# Altium PCB ETR_CELLMETER_SLAVE.PcbDoc (part 1 of 3)
Units mm, origin at the board's own origin, x right, y up, seen from the top; angles counter-clockwise.
Board outline 150 x 85 mm, 4 copper layers (Top Layer, GND, PWR, Bottom Layer), stack 1.306 mm thick; 204 components, 127 nets, 635 pads, 234 vias.
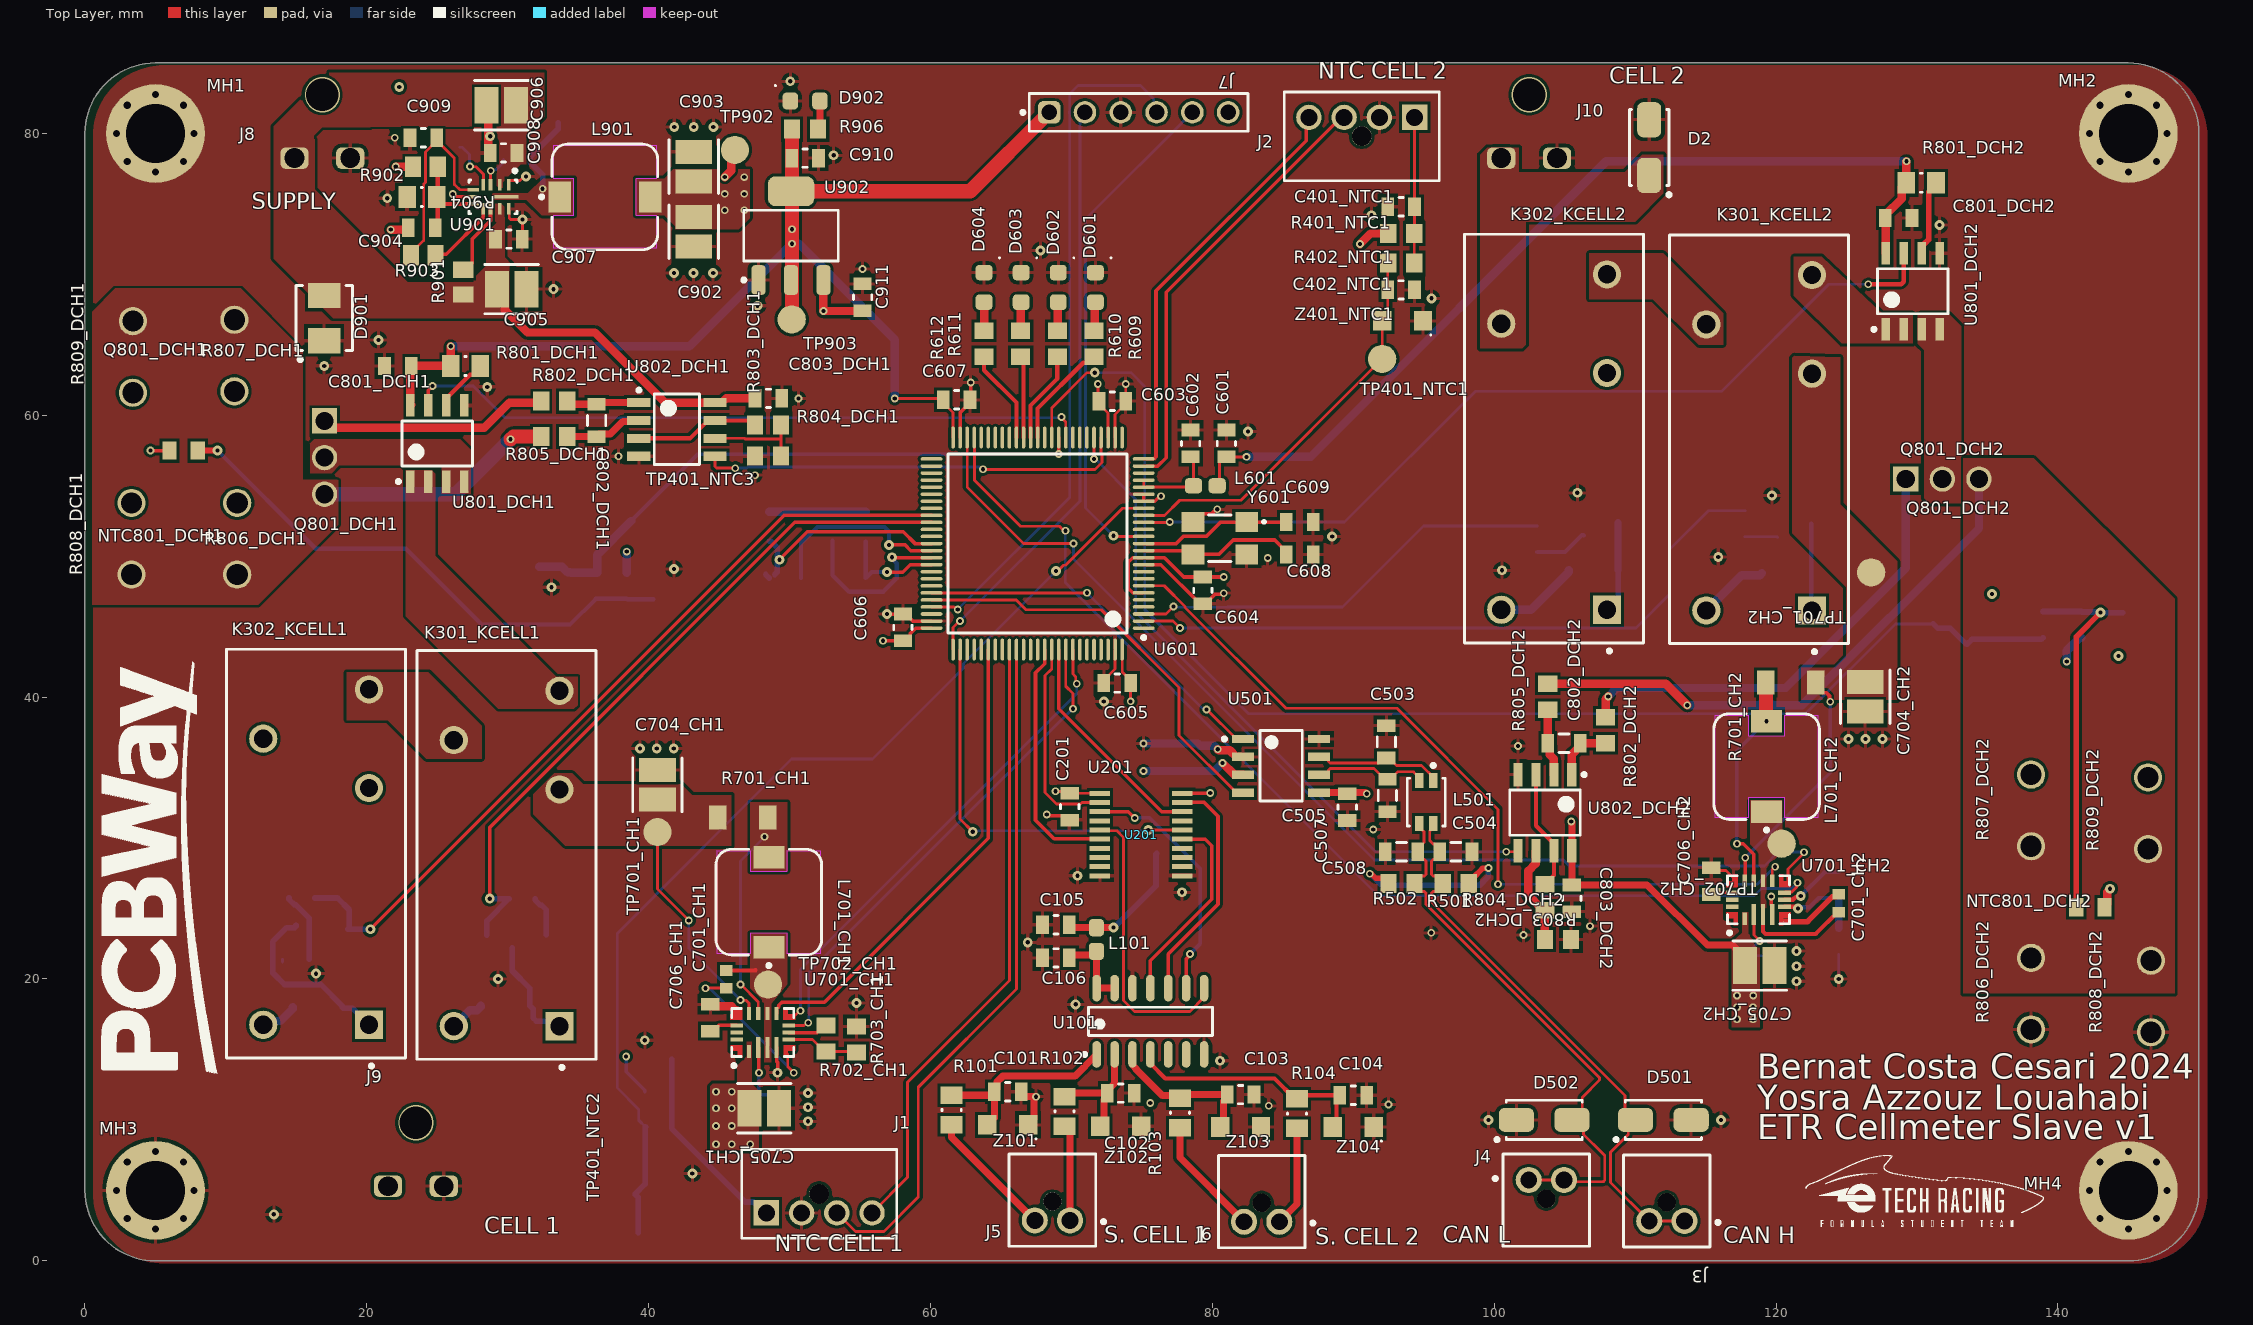
[diagram p0: Top Layer view]
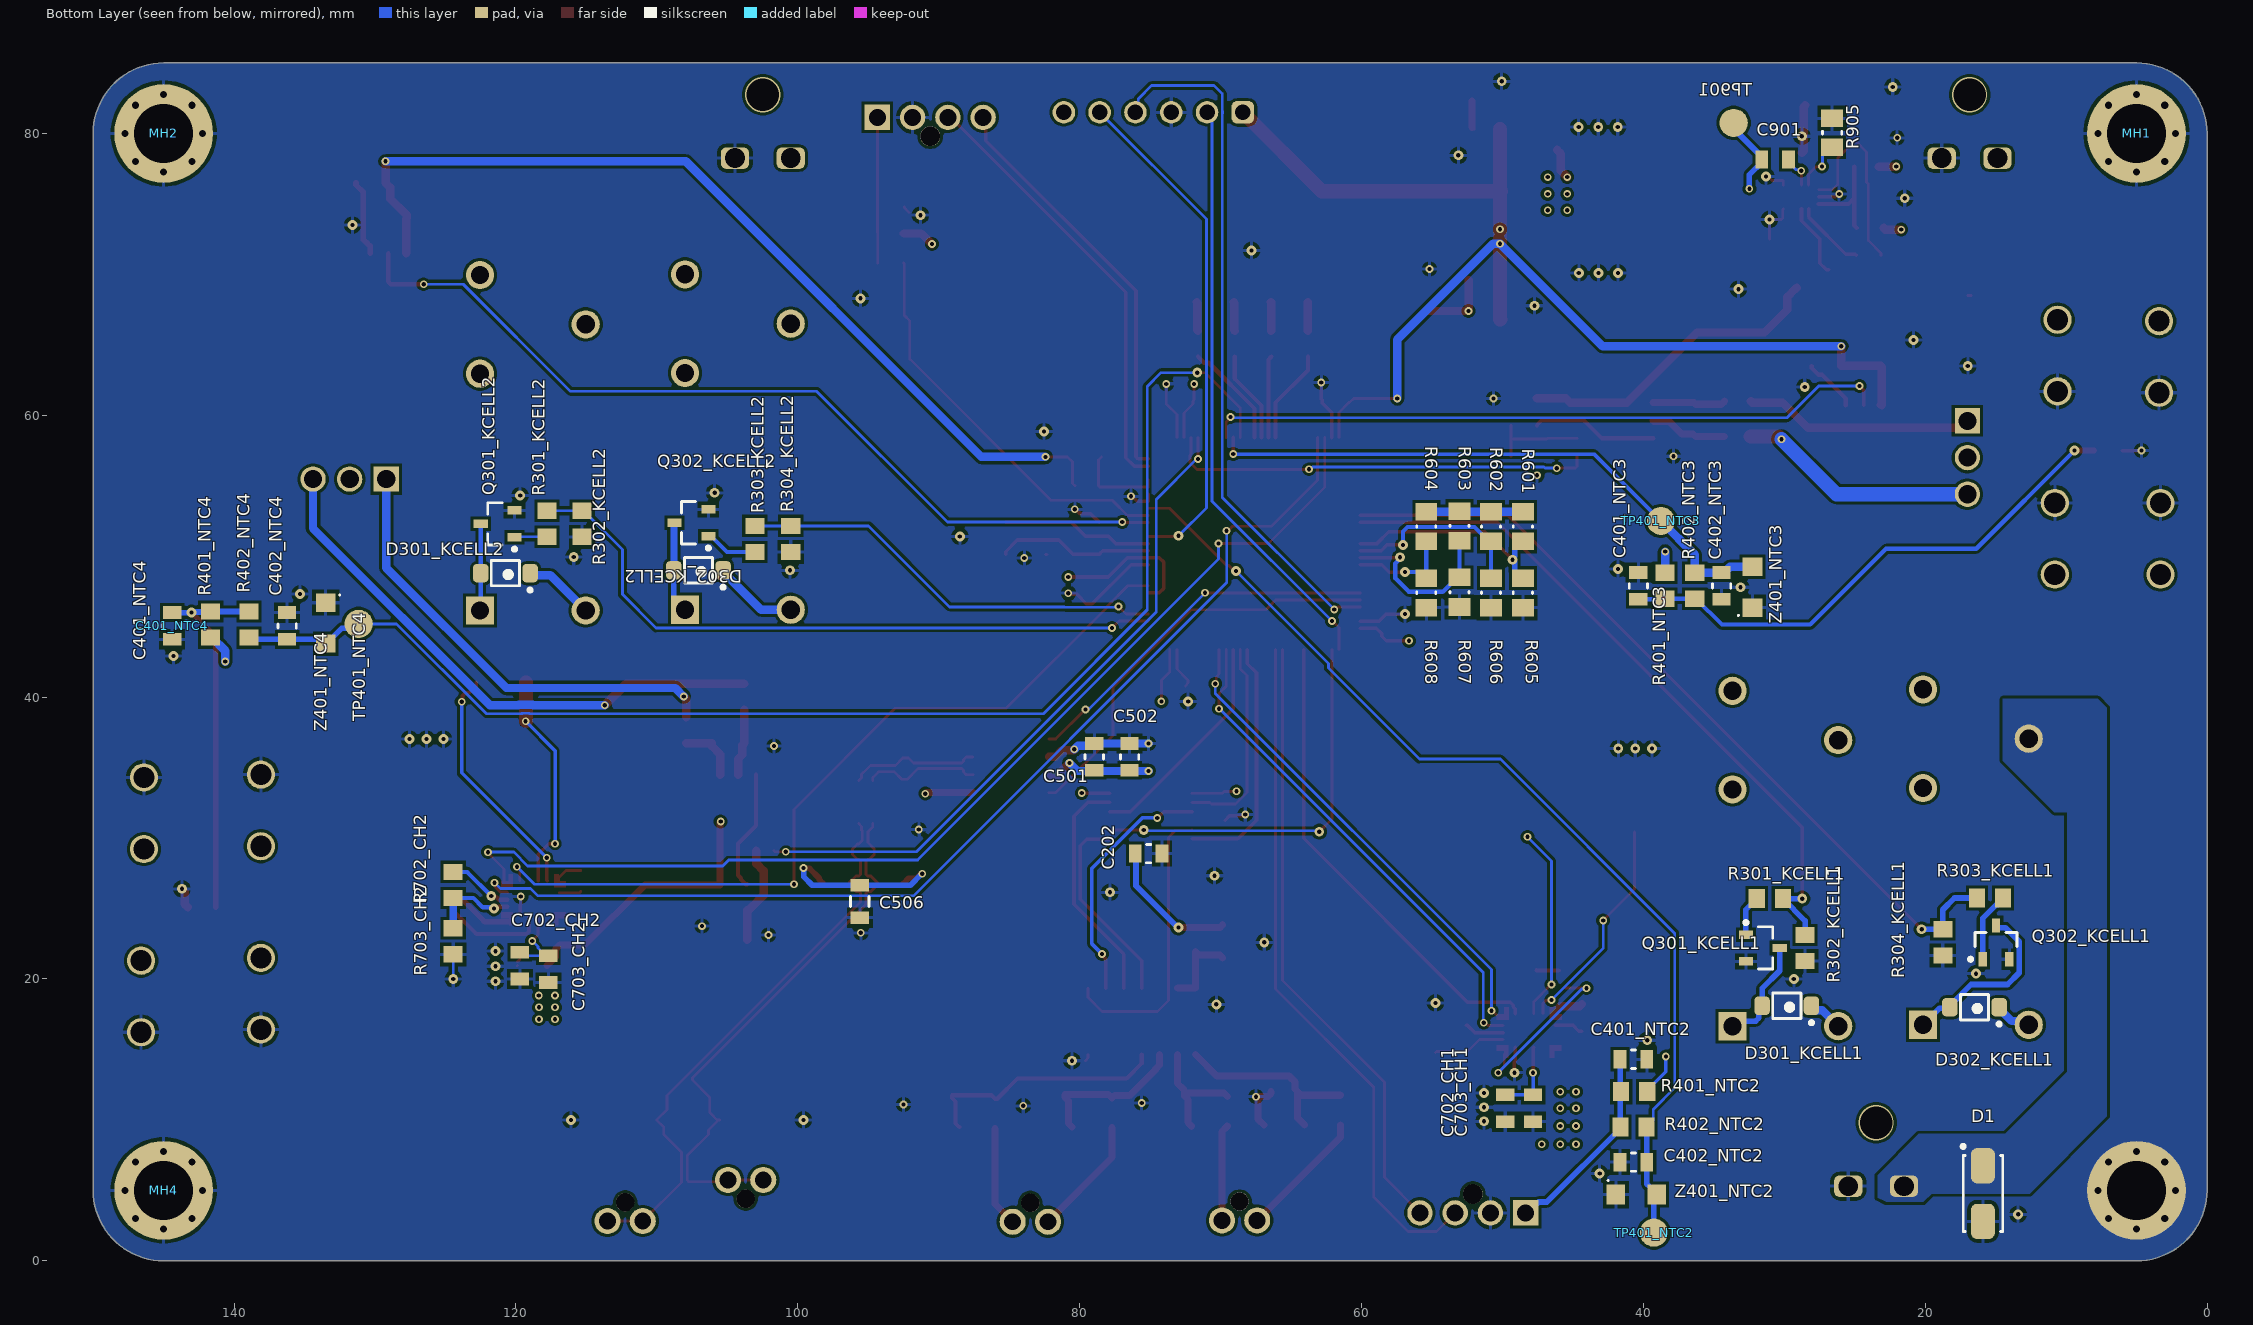
[diagram p1: Bottom Layer view, seen from below]
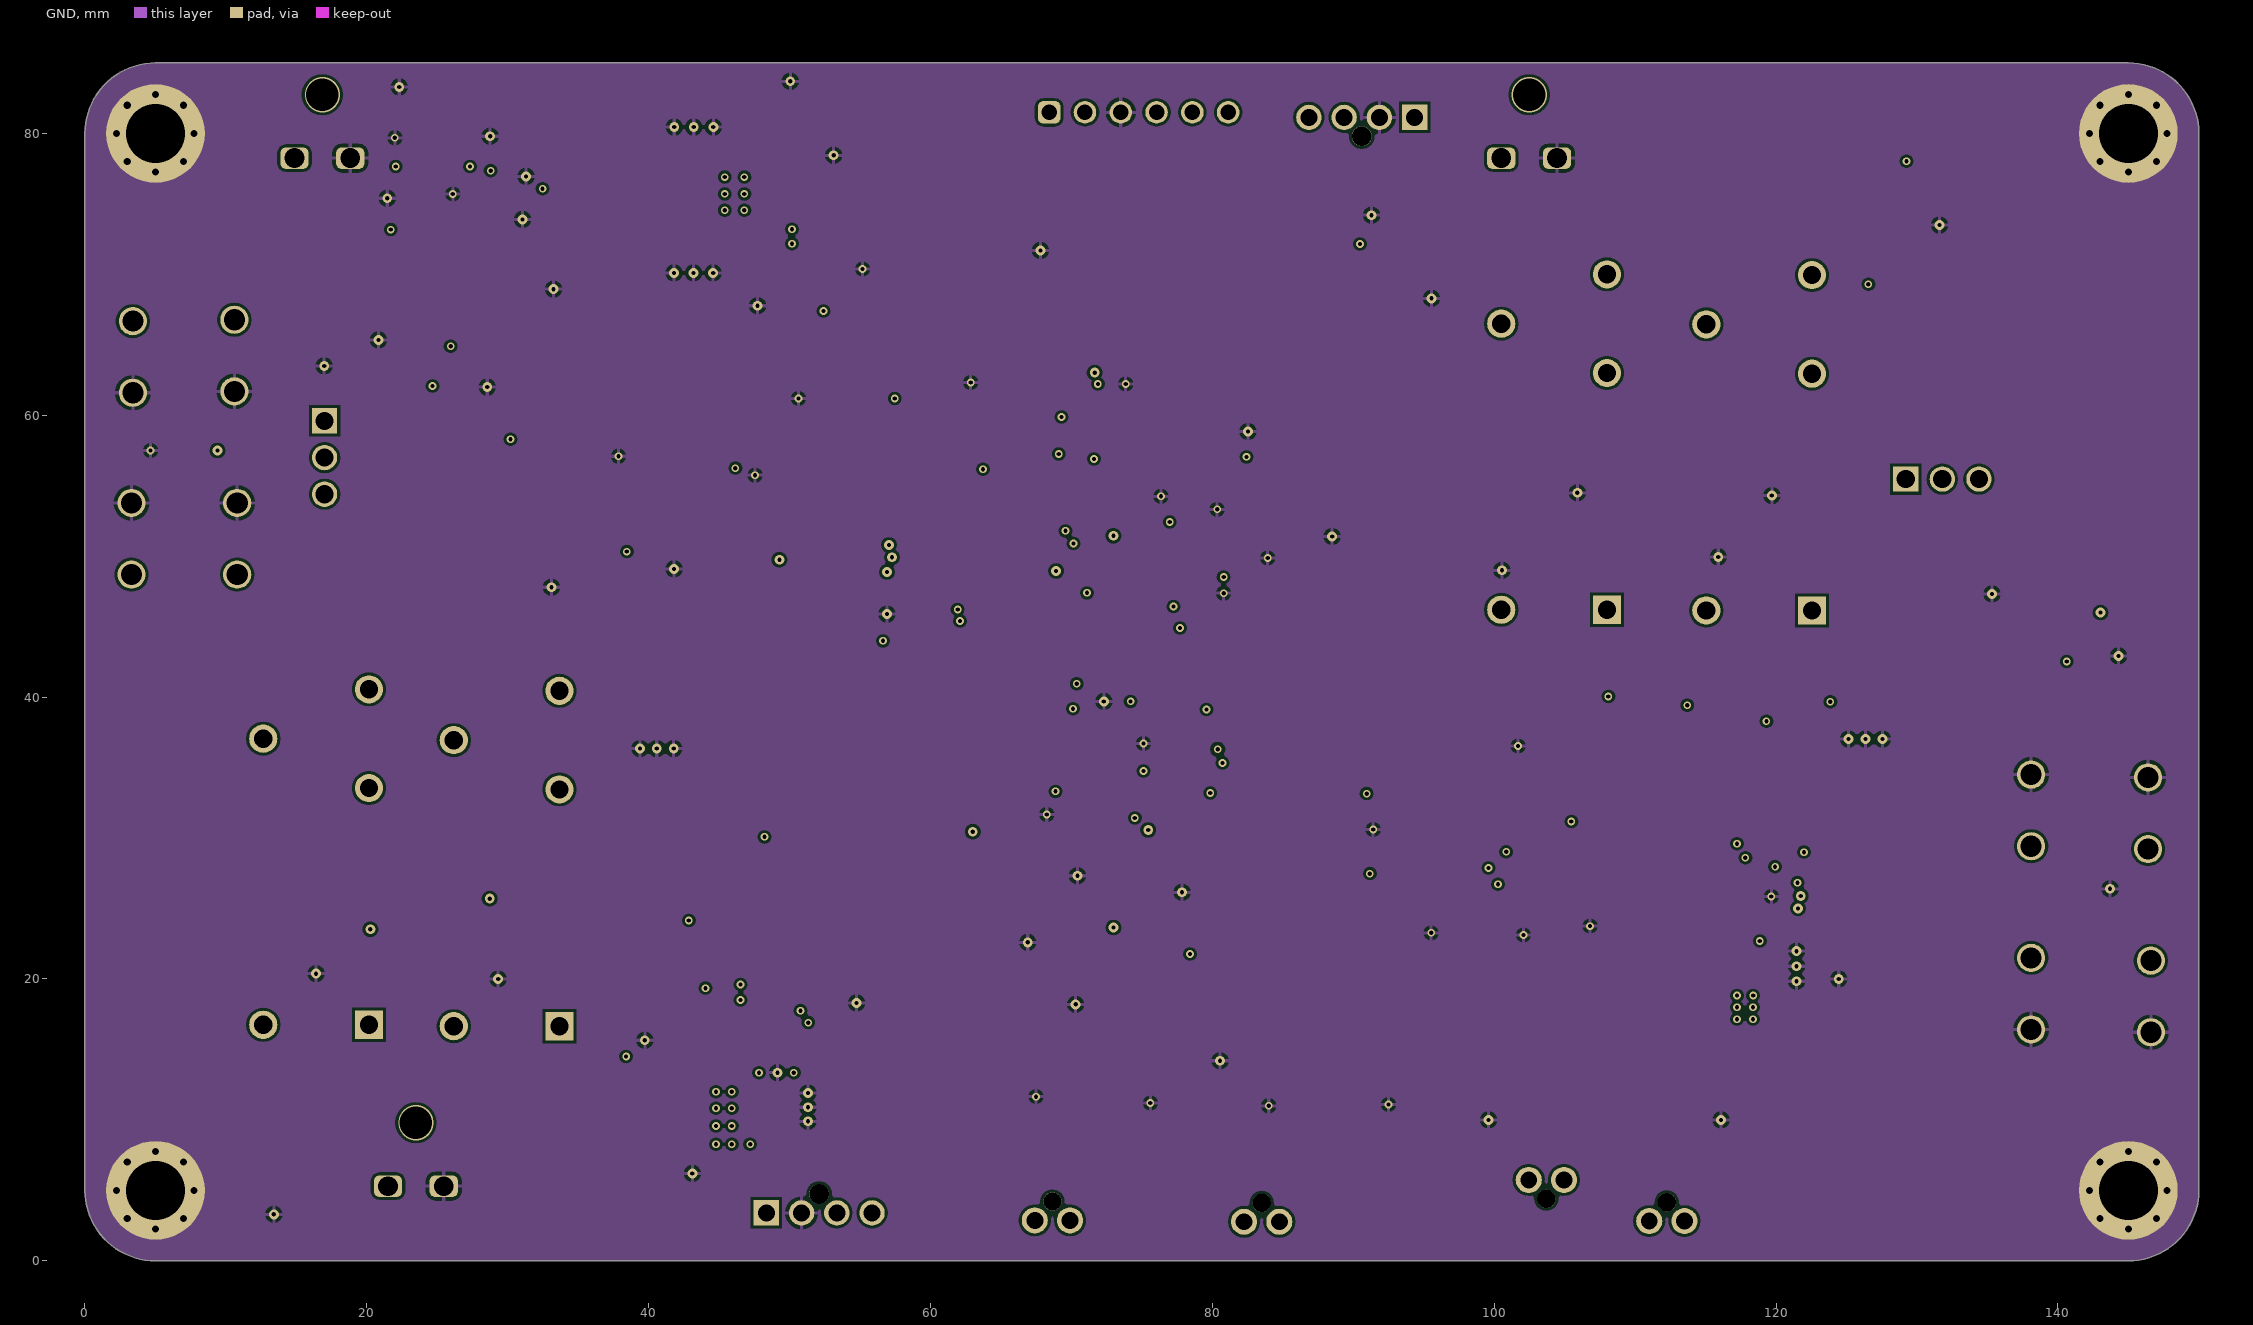
[diagram p2: GND]
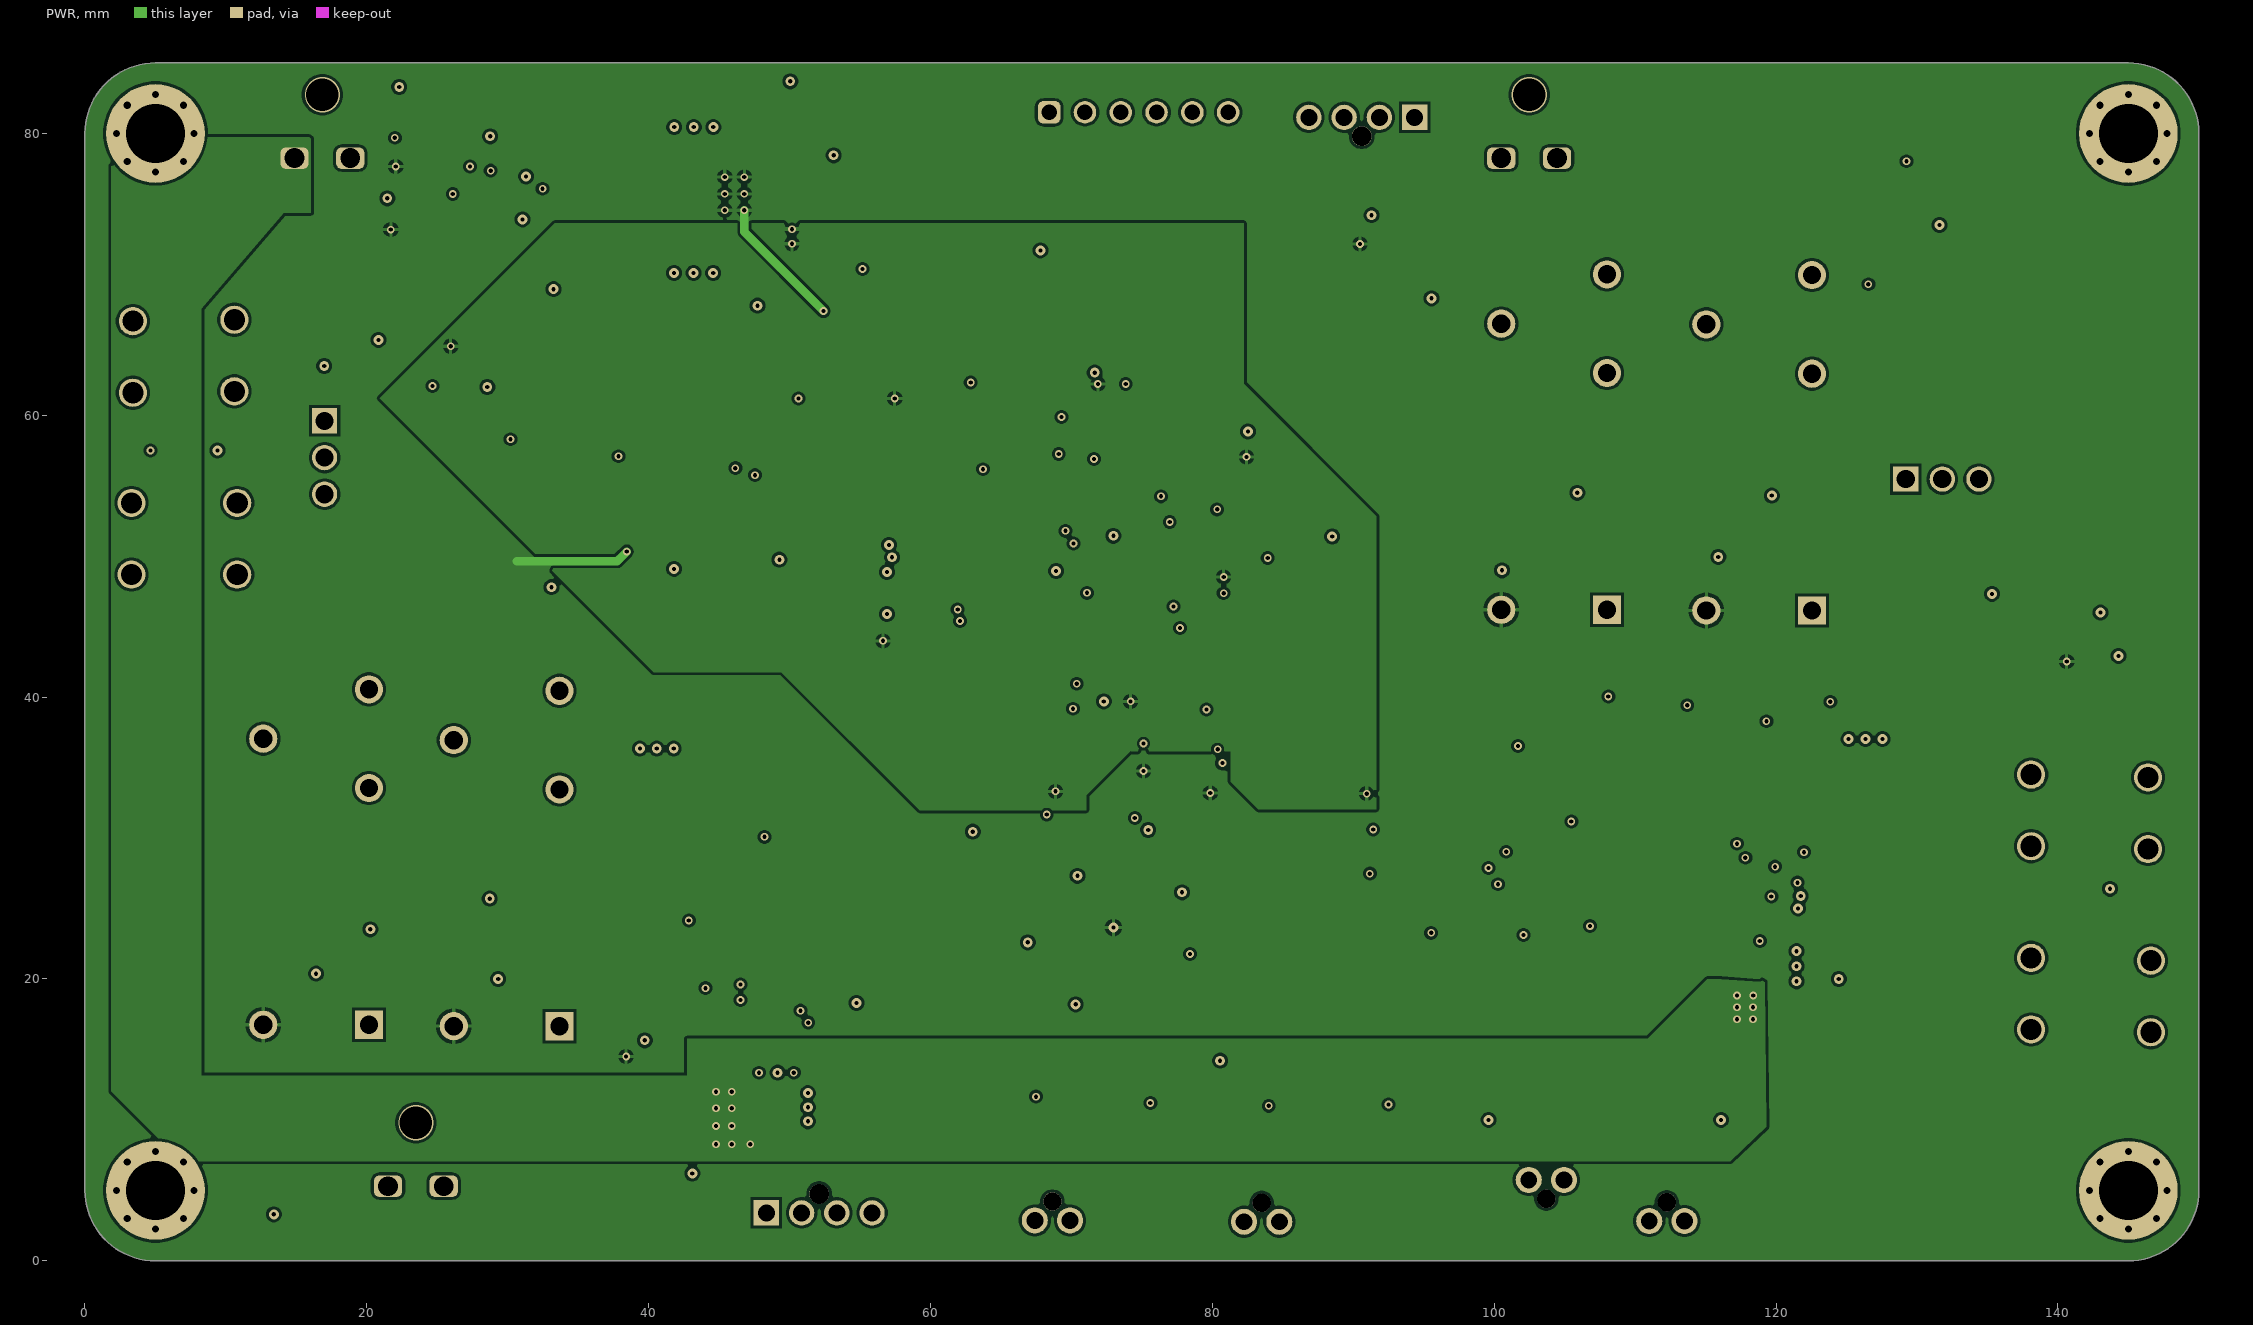
[diagram p3: PWR]
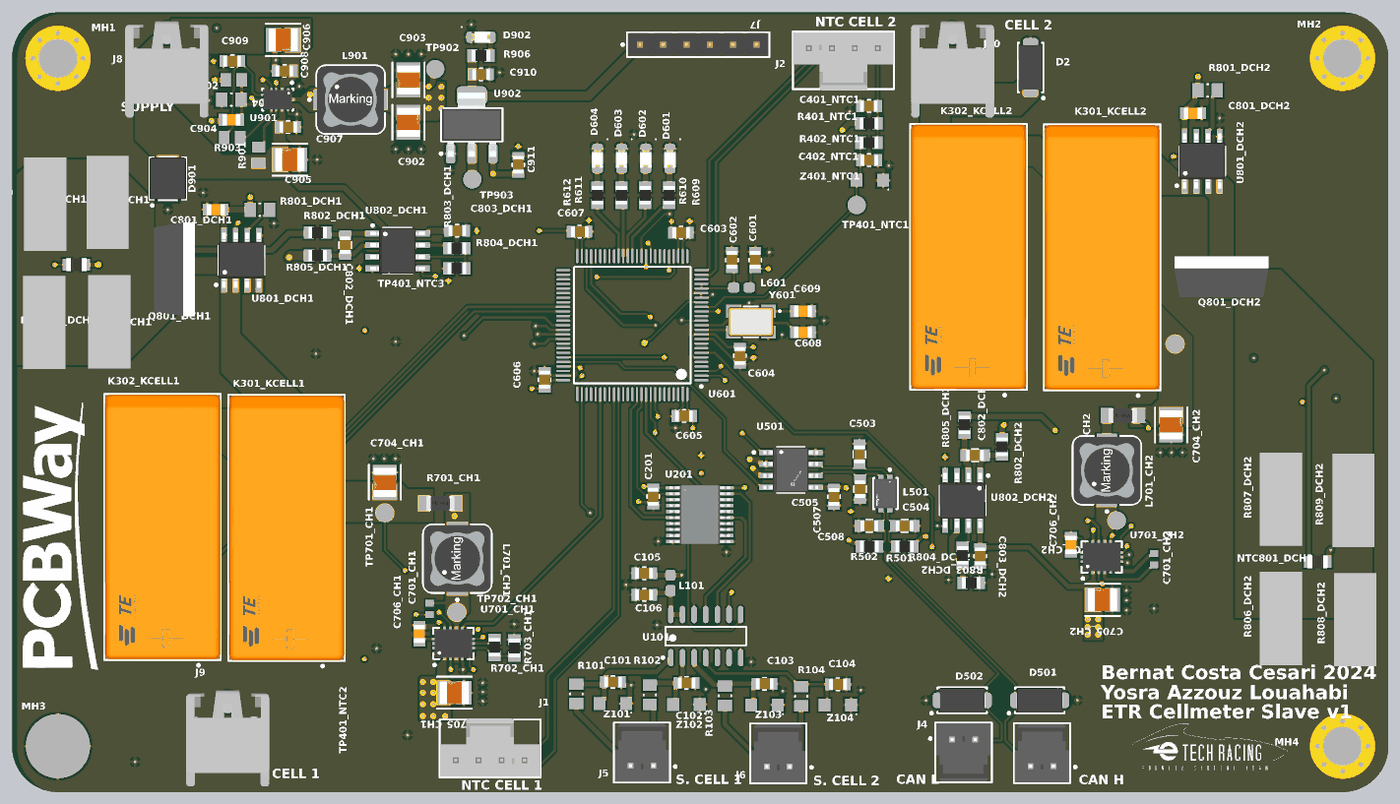
[diagram p5: 3D render of the assembled board from above, using the file's embedded part models]
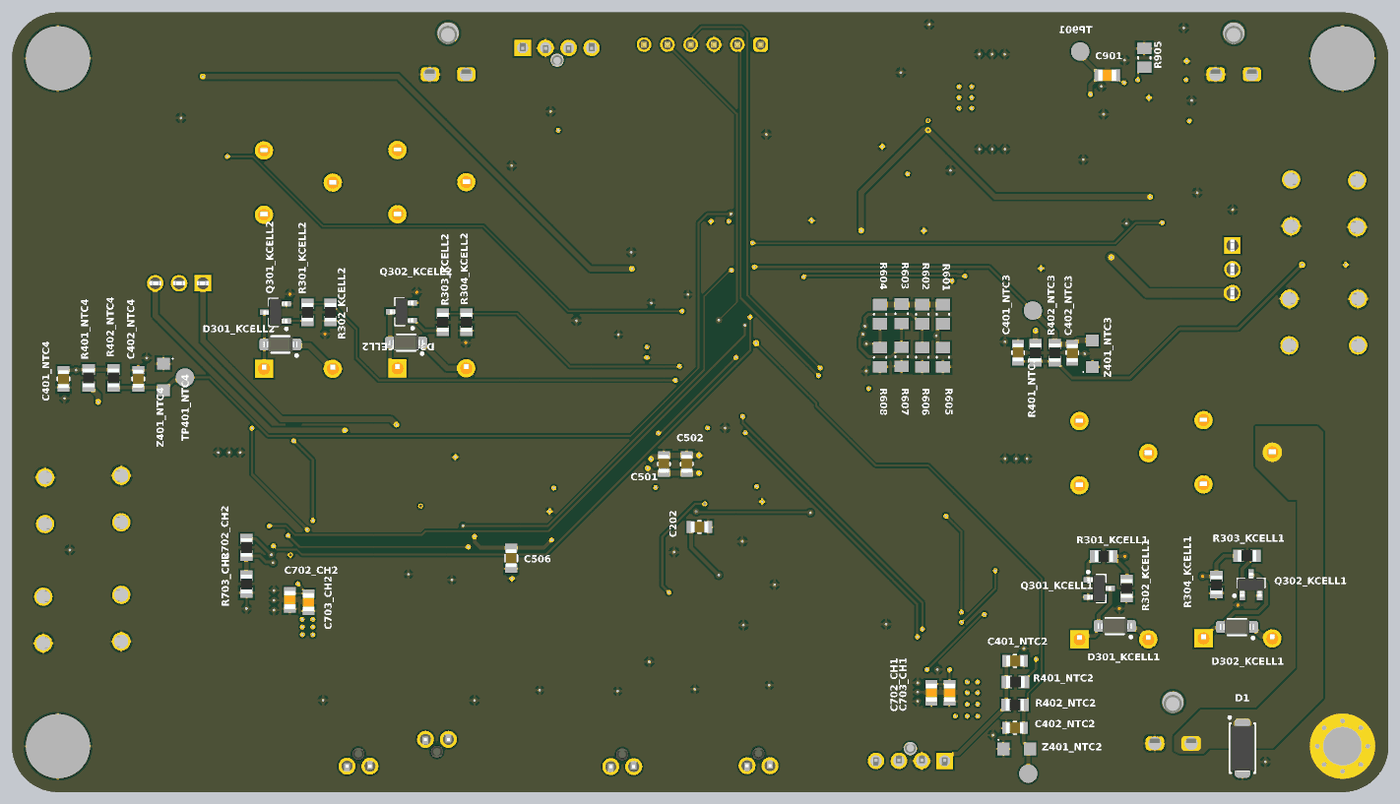
[diagram p6: 3D render of the assembled board from below, using the file's embedded part models]

## Layer stack, top to bottom
Top Solder: solder mask 0.01, Solder Resist, Dk 3.5
Top Layer: signal copper 0.035
Dielectric 2: prepreg 0.1, PP-006, Dk 4.1
GND: signal copper 0.018
Dielectric 1: core 1, FR-4, Dk 4.8
PWR: signal copper 0.018
Dielectric 3: prepreg 0.1, PP-006, Dk 4.1
Bottom Layer: signal copper 0.035
Bottom Solder: solder mask 0.01, Solder Resist, Dk 3.5

## Board outline
0,5 0,80 cw(c5,80) 5,85 145,85 cw(c145,80) 150,80 150,5 cw(c145,5) 145,0 5,0 cw(c5,5)

## Design rules (kind name [scope] priority, off if disabled: settings)
Clearance [All] p1: gap=0.2 ignorepadtopadclearanceinfootprint=TRUE
ComponentClearance [All] p1: gap=0.15 collisioncheckmode=3 verticalgap=0.15 showdistances=FALSE
DiffPairsRouting [All] p1: maxlimit=0.254 minlimit=0.2 mostfreqgap=0.254 toplayer_maxgap=0.2 toplayer_prefgap=0.2 toplayer_minwidth=0.2 toplayer_maxwidth=0.2 toplayer_prefwidth=0.2 midlayer1_mingap=0.254 midlayer1_minwidth=0.381 midlayer1_maxwidth=0.381 midlayer1_prefwidth=0.381 midlayer2_mingap=0.254 midlayer2_minwidth=0.381 midlayer2_maxwidth=0.381 midlayer2_prefwidth=0.381 bottomlayer_maxgap=0.2 bottomlayer_prefgap=0.2 bottomlayer_minwidth=0.2 bottomlayer_maxwidth=0.2 bottomlayer_prefwidth=0.2 maxuncoupledlength=12.7
HoleSize [All] p1: absolutevalues=TRUE maxlimit=5 minlimit=0.025 maxpercent=80.000 minpercent=20.000
HoleToHoleClearance [All] p1: gap=0.15 allowstackedmicrovias=TRUE
MinimumSolderMaskSliver [All] p1: minsoldermaskwidth=0.15
PolygonConnect PolygonDirect [Name Like ('*_DIRECT')] p1: connectstyle=Direct reliefconductorwidth=0.254 reliefentries=4 polygonreliefangle="90 Angle" airgapwidth=0.254
PolygonConnect [All] p2: connectstyle=Relief reliefconductorwidth=0.254 reliefentries=4 polygonreliefangle="90 Angle" airgapwidth=0.254
RoutingVias [All] p1: holewidth=0.3 width=0.55 viastyle="Through Hole" minholewidth=0.3 minwidth=0.55 maxholewidth=0.7 maxwidth=1
SilkToSilkClearance [All] p1: silktosilkclearance=0
SilkToSolderMaskClearance [IsPad] p1: minsilkscreentomaskgap=0 clearancetoexposedcopper=TRUE
SolderMaskExpansion [All] p1: expansion=0.055 istentingtop=FALSE
SupplyNets "Schematic Supply Nets_6" [InNet('GND')] p1: voltage=0.000
SupplyNets "Schematic Supply Nets_5" [InNet('+12V')] p2: voltage=0.000
SupplyNets "Schematic Supply Nets_4" [InNet('3V3_MCU')] p3: voltage=0.000
SupplyNets "Schematic Supply Nets_2" [InNet('+5V')] p4: voltage=0.000
SupplyNets "Schematic Supply Nets_1" [InNet('3V3_A')] p5: voltage=0.000
SupplyNets "Schematic Supply Nets" [InNet('+3V3')] p6: voltage=0.000
Width [All] p1: maxlimit=10 minlimit=0.2 preferedwidth=0.6 toplayer_prefwidth=0.2 midlayer1_maxwidth=2 midlayer2_maxwidth=2 bottomlayer_prefwidth=0.2 minimp=50.000000 maximp=50.000000 favimp=50.000000
23 further rules are at their usual default settings.

## Classes and differential pairs
component class NTC4: C401_NTC4 C402_NTC4 R401_NTC4 R402_NTC4 TP401_NTC4 Z401_NTC4
component class NTC3: C401_NTC3 C402_NTC3 R401_NTC3 R402_NTC3 TP401_NTC3 Z401_NTC3
channel class Relay: KCELL1 KCELL2
channel class NTC: NTC1 NTC2 NTC3 NTC4
channel class Discharge: DCH1 DCH2
channel class Charge: CH1 CH2
component class NTC2: C401_NTC2 C402_NTC2 R401_NTC2 R402_NTC2 TP401_NTC2 Z401_NTC2
component class NTC1: C401_NTC1 C402_NTC1 R401_NTC1 R402_NTC1 TP401_NTC1 Z401_NTC1
component class Level_Shifter: C201 C202 U201
component class KCELL2: D301_KCELL2 D302_KCELL2 K301_KCELL2 K302_KCELL2 Q301_KCELL2 Q302_KCELL2 R301_KCELL2 R302_KCELL2 R303_KCELL2 R304_KCELL2
component class KCELL1: D301_KCELL1 D302_KCELL1 K301_KCELL1 K302_KCELL1 Q301_KCELL1 Q302_KCELL1 R301_KCELL1 R302_KCELL1 R303_KCELL1 R304_KCELL1
component class DCH2: C801_DCH2 C802_DCH2 C803_DCH2 NTC801_DCH2 Q801_DCH2 R801_DCH2 R802_DCH2 R803_DCH2 R804_DCH2 R805_DCH2 R806_DCH2 R807_DCH2 R808_DCH2 R809_DCH2 U801_DCH2 U802_DCH2
component class DCH1: C801_DCH1 C802_DCH1 C803_DCH1 NTC801_DCH1 Q801_DCH1 R801_DCH1 R802_DCH1 R803_DCH1 R804_DCH1 R805_DCH1 R806_DCH1 R807_DCH1 R808_DCH1 R809_DCH1 U801_DCH1 U802_DCH1
component class CH2: C701_CH2 C702_CH2 C703_CH2 C704_CH2 C705_CH2 C706_CH2 L701_CH2 R701_CH2 R702_CH2 R703_CH2 TP701_CH2 U701_CH2
component class CH1: C701_CH1 C702_CH1 C703_CH1 C704_CH1 C705_CH1 C706_CH1 L701_CH1 R701_CH1 R702_CH1 R703_CH1 TP701_CH1 U701_CH1
component class U_Supply: C901 C902 C903 C904 C905 C906 C907 C908 C909 C910 C911 D901 D902 L901 R901 R902 R903 R904 R905 R906 TP901 TP902 TP903 U901 U902
component class MCU: C501 C502 C503 C504 C505 C506 C507 C508 C607 D501 D502 D603 D604 L501 R501 R502 R603 R604 R605 R606 R607 R608 R609 R610 R611 R612 U501 Y601
component class CAN: C501 C502 C503 C504 C505 C506 C507 C508 D501 D502 L501 R501 R502 U501
component class ETR_CELLMETER_SLAVE: D1 D2 J1 J2 J3 J4 J5 J6 J7 J8 J9 J10 MH1 MH2 MH3 MH4
component class ADC: C101 C102 C103 C104 C105 C106 L101 R101 R102 R103 R104 U101 Z101 Z102 Z103 Z104
differential pair CAN1: +CAN1_H -CAN1_L
differential pair CAN_FIL: +CAN_FIL_H -CAN_FIL_L

## Components (designator, comment, footprint, x,y, rotation, side; value= is the part's Value field where it differs from the comment)
C101 "C100n-50V-0805FNPC-X7R" C0805FNPC-R 65.48,12 r180 top value=100nF
C102 "C100n-50V-0805FNPC-X7R" C0805FNPC-R 73.5,11.9 r180 top value=100nF
C103 "C100n-50V-0805FNPC-X7R" C0805FNPC-R 82,11.8 r180 top value=100nF
C104 "C100n-50V-0805FNPC-X7R" C0805FNPC-R 90,11.75 r180 top value=100nF
C105 "C100n-50V-0805FNPC-X7R" C0805FNPC-R 68.902,23.85 r0 top value=100nF
C106 "C100n-50V-0805FNPC-X7R" C0805FNPC-R 68.902,21.5 r0 top value=100nF
C201 "C100n-50V-0805FNPC-X7R" C0805FNPC-R 69.875,32.225 r90 top value=100nF
C202 "C100n-50V-0805FNPC-X7R" C0805FNPC-R 75.1,28.9 r0 bottom value=100nF
C401_NTC1 "C100n 0805" C0805FNPC-R 93.4,74.8 r0 top value=100nF (schematic designator C401)
C401_NTC2 "C100n 0805" C0805FNPC-R 40.7,14.3 r0 bottom value=100nF (schematic designator C401)
C401_NTC3 "C100n 0805" C0805FNPC-R 40.35,47.9 r270 bottom value=100nF (schematic designator C401)
C401_NTC4 "C100n 0805" C0805FNPC-R 144.4,45.05 r90 bottom value=100nF (schematic designator C401)
C402_NTC1 "C100n 0805" C0805FNPC-R 93.4,68.9 r180 top value=100nF (schematic designator C402)
C402_NTC2 "C100n 0805" C0805FNPC-R 40.7,7 r180 bottom value=100nF (schematic designator C402)
C402_NTC3 "C100n 0805" C0805FNPC-R 34.45,47.9 r90 bottom value=100nF (schematic designator C402)
C402_NTC4 "C100n 0805" C0805FNPC-R 136.244,45.05 r270 bottom value=100nF (schematic designator C402)
C501 "C100n-50V-0805FNPC-X7R" C0805FNPC-R 78.96,35.76 r270 bottom value=100nF
C502 "C100n-50V-0805FNPC-X7R" C0805FNPC-R 76.46,35.76 r270 bottom value=100nF
C503 "C100p-50V-0805FNPC-C0G/NP0" C0805FNPC-W 92.35,36.825 r90 top value=100pF
C504 "C100p-50V-0805FNPC-C0G/NP0" C0805FNPC-W 97.275,29.025 r180 top value=100pF
C505 "C100n-50V-0805FNPC-X7R" C0805FNPC-R 89.575,32.2 r90 top value=100nF
C506 "C100p-50V-0805FNPC-C0G/NP0" C0805FNPC-W 95.6,25.5 r270 bottom value=100pF
C507 "C100p-50V-0805FNPC-C0G/NP0" C0805FNPC-W 92.425,33.025 r90 top value=100pF
C508 "C100p-50V-0805FNPC-C0G/NP0" C0805FNPC-W 93.425,29.025 r180 top value=100pF
C601 "C100n" C0805FNPC-R 81,58 r270 top value=100nF
C602 "C100n" C0805FNPC-R 78.45,58 r270 top value=100nF
C603 "C100n-50V-0805FNPC-X7R" C0805FNPC-R 72.9,61 r180 top value=100nF
C604 "C100n-50V-0805FNPC-X7R" C0805FNPC-R 79.325,47.575 r90 top value=100nF
C605 "C100n-50V-0805FNPC-X7R" C0805FNPC-R 73.25,41 r0 top value=100nF
C606 "C100n-50V-0805FNPC-X7R" C0805FNPC-R 58.042,44.945 r270 top value=100nF
C607 "C100n 0805" C0805FNPC-R 61.85,61.1 r180 top value=100nF
C608 "C10pF 0805" WCAP-CSGP_0805_L2W1.25H0.6_Reflow 86.2,50.125 r0 top
C609 "C10pF 0805" WCAP-CSGP_0805_L2W1.25H0.6_Reflow 86.2,52.425 r0 top
C701_CH1 "C100nF-25V-0603" CAPC1608X92X38LL15T08 45.5,19.975 r270 top value=100nF (schematic designator C701)
C701_CH2 "C100nF-25V-0603" CAPC1608X92X38LL15T08 124.45,25.375 r90 top value=100nF (schematic designator C701)
C702_CH1 "C22uF-25V-0805" WCAP-CSGP_0805_L2W1.25H0.8_Reflow 49.8,10.825 r90 bottom value=22µF (schematic designator C702)
C702_CH2 "C22uF-25V-0805" WCAP-CSGP_0805_L2W1.25H0.8_Reflow 119.725,20.95 r90 bottom value=22µF (schematic designator C702)
C703_CH1 "C22uF-25V-0805" WCAP-CSGP_0805_L2W1.25H0.8_Reflow 47.825,10.825 r90 bottom value=22µF (schematic designator C703)
C703_CH2 "C22uF-25V-0805" WCAP-CSGP_0805_L2W1.25H0.8_Reflow 117.699,20.7 r90 bottom value=22µF (schematic designator C703)
C704_CH1 "C47µF 1210" FP-GRM32E-0_3-0_2-IPC_C#1 40.625,33.775 r270 top value=47µF (schematic designator C704)
C704_CH2 "C47µF 1210" FP-GRM32E-0_3-0_2-IPC_C#1 126.325,40.025 r90 top value=47µF (schematic designator C704)
C705_CH1 "C47µF 1210" FP-GRM32E-0_3-0_2-IPC_C#1 48.2,10.825 r180 top value=47µF (schematic designator C705)
C705_CH2 "C47µF 1210" FP-GRM32E-0_3-0_2-IPC_C#1 118.85,20.95 r180 top value=47µF (schematic designator C705)
C706_CH1 "C1uF 0805" WCAP-CSGP_0805_L2W1.25H1.25#1 44.375,17.25 r270 top (schematic designator C706)
C706_CH2 "C1uF 0805" WCAP-CSGP_0805_L2W1.25H1.25#1 115.4,26.95 r270 top (schematic designator C706)
C801_DCH1 "C1u 0805" WCAP-CSGP_0805_L2W1.25H1.25#2 22.2,63.5 r180 top (schematic designator C801)
C801_DCH2 "C1u 0805" WCAP-CSGP_0805_L2W1.25H1.25#2 128.7,74 r0 top (schematic designator C801)
C802_DCH1 "C100p 0805" C0805FNPC-W 36.3,59.635 r90 top value=100pF (schematic designator C802)
C802_DCH2 "C100p 0805" C0805FNPC-W 104.95,36.725 r0 top value=100pF (schematic designator C802)
C803_DCH1 "C100n-50V-0805FNPC-X7R" C0805FNPC-R 48.5,61.2 r180 top value=100nF (schematic designator C803)
C803_DCH2 "C100n-50V-0805FNPC-X7R" C0805FNPC-R 105.505,25.725 r90 top value=100nF (schematic designator C803)
C901 "885012207096" WCAP-CSGP_0805_L2W1.25H0.8_Reflow 30.65,78.15 r0 bottom value=47nF
C902 "C47µF 1210" FP-GRM32E-0_3-0_2-IPC_C#2 43.2,73.025 r90 top value=47µF
C903 "C47µF 1210" FP-GRM32E-0_3-0_2-IPC_C#2 43.2,77.651 r270 top value=47µF
C904 "C10pF_0805_50V" WCAP-CSGP_0805_L2W1.25H0.6_Reflow 23.9,73.3 r180 top value=10pF
C905 "C47µF-10V-1210" FP-GRM32E-0_3-0_2-IPC_C#1 30.275,68.95 r180 top value=47µF
C906 "C47µF-10V-1210" FP-GRM32E-0_3-0_2-IPC_C#1 29.55,82 r0 top value=47µF
C907 "C100n-50V-0805FNPC-X7R" C0805FNPC-R 30.075,72.5 r180 top value=100nF
C908 "C100n-50V-0805FNPC-X7R" C0805FNPC-R 29.7,78.616 r0 top value=100nF
C909 "C1u-50V-0805FNPC-X7R" C0805FNPC-R 24.008,79.691 r0 top value=1µF
C910 "C10u 0805" C0805FNPC-R 51.1,78.25 r180 top value=10µF
C911 "C10u 0805" C0805FNPC-R 55.175,68.375 r270 top value=10µF
D1 "TVS 6V DO-214AC" DTVS-DO-214AC 15.9,4.775 r90 bottom
D2 "TVS 6V DO-214AC" DTVS-DO-214AC 111,79 r270 top
D301_KCELL1 "DSC-0.5/30-SOD123" DSC-SOD123 29.82,18.1 r0 bottom (schematic designator D301)
D301_KCELL2 "DSC-0.5/30-SOD123" DSC-SOD123 120.75,48.8 r0 bottom (schematic designator D301)
D302_KCELL1 "DSC-0.5/30-SOD123" DSC-SOD123 16.5,18 r0 bottom (schematic designator D302)
D302_KCELL2 "DSC-0.5/30-SOD123" DSC-SOD123 107.05,49 r0 bottom (schematic designator D302)
D501 "TVS 6V" DTVS-DO-214AC 112,10 r180 top
D502 "TVS 6V" DTVS-DO-214AC 103.55,10 r180 top
D601 "LEDBS-0805-145" LED_0805_WE 71.7,69.075 r270 top
D602 "LEDBS-0805-145" LED_0805_WE 69.067,69.075 r270 top
D603 "LEDBS-0805-145" LED_0805_WE 66.433,69.075 r270 top
D604 "LEDBS-0805-145" LED_0805_WE 63.8,69.075 r270 top
D901 "SMBJ26CAHE3_B/H" CAPM3216X18N 16.975,66.9 r90 top
D902 "150080VS75000" LED_0805_WE 51.1,82.3 r0 top
J1 "NanoFit 1x4" J_NanoFit_1x4_V 52.1,3.4 r180 top
J2 "NanoFit 1x4" J_NanoFit_1x4_V 90.6,81.14 r0 top
J3 "NanoFit 1x2" FP-105309-1102-MFG 112.25,4.25 r180 top
J4 "NanoFit 1x2" FP-105309-1102-MFG 103.7,4.31 r0 top
J5 "NanoFit 1x2" FP-105309-1102-MFG 68.65,4.3 r180 top
J6 "NanoFit 1x2" FP-105309-1102-MFG 83.5,4.2 r180 top
J7 "ST Link" J_STLink_PinHeader 74.77,81.5 r0 top
J8 "J_2x1_14A_TE" 179838-2 14.865,78.25 r0 top
J9 "J_2x1_14A_TE" 179838-2 21.5,5.3 r0 top
J10 "J_2x1_14A_TE" 179838-2 100.5,78.25 r0 top
K301_KCELL1 "Relay_RZ01-1C4-D005" FP-1415899-7-MFG 29.92,28.8 r90 top (schematic designator K301)
K301_KCELL2 "Relay_RZ01-1C4-D005" FP-1415899-7-MFG 118.8,58.3 r90 top (schematic designator K301)
K302_KCELL1 "Relay_RZ01-1C4-D005" FP-1415899-7-MFG 16.4,28.9 r90 top (schematic designator K302)
K302_KCELL2 "Relay_RZ01-1C4-D005" FP-1415899-7-MFG 104.25,58.35 r90 top (schematic designator K302)
L101 "782853561" L_Ferrite_bead_0805 71.771,22.8 r270 top
L501 "DLW32SH510XF2L" FP-DLW32PH-MFG 95.175,32.55 r270 top
L601 "782853561" L_Ferrite_bead_0805 79.5,55 r180 top
L701_CH1 "L1uH_120V_8A" WE-PD_7345 48.525,25.45 r90 top value=1uH (schematic designator L701)
L701_CH2 "L1uH_120V_8A" WE-PD_7345 119.325,35.075 r90 top value=1uH (schematic designator L701)
L901 "L2.2uH" WE-PD_7345 36.9,75.5 r0 top
MH1 "Mounting_Hole_M4" Mounting_Hole_M4#1 5,80 r0 top
MH2 "Mounting_Hole_M4" Mounting_Hole_M4#1 145,80 r0 top
MH3 "Mounting_Hole_M4" Mounting_Hole_M4#2 5,5 r0 top
MH4 "Mounting_Hole_M4" Mounting_Hole_M4#1 145,5 r0 top
NTC801_DCH1 "NTC SMD 0805" RESC2012X10N 7,57.5 r180 top (schematic designator NTC801)
NTC801_DCH2 "NTC SMD 0805" RESC2012X10N 142.3,25.1 r0 top (schematic designator NTC801)
Q301_KCELL1 "SQ2318CES-T1_GE3" SOT95P245X110-3N 31.52,22.2 r180 bottom (schematic designator Q301)
Q301_KCELL2 "SQ2318CES-T1_GE3" SOT95P245X110-3N 121.3,52.3 r0 bottom (schematic designator Q301)
Q302_KCELL1 "SQ2318CES-T1_GE3" SOT95P245X110-3N 14.975,22.6 r90 bottom (schematic designator Q302)
Q302_KCELL2 "SQ2318CES-T1_GE3" SOT95P245X110-3N 107.55,52.375 r0 bottom (schematic designator Q302)
Q801_DCH1 "SIHP25N60EFL-BE3" SIHP25N60EFL-BE3-Footprint-1 17,57 r270 top (schematic designator Q801)
Q801_DCH2 "SIHP25N60EFL-BE3" SIHP25N60EFL-BE3-Footprint-1 131.8,55.475 r0 top (schematic designator Q801)
R101 "R1K_0805_0.125W" 0805#1 61.5,10.7 r180 top value=1k
R102 "R1K_0805_0.125W" 0805#1 69.5,10.6 r180 top value=1k
R103 "R1K_0805_0.125W" 0805#1 77.7,10.5 r180 top value=1k
R104 "R1K_0805_0.125W" 0805#1 86,10.45 r180 top value=1k
R301_KCELL1 "R100 0805" R0805FTK 31.02,25.7 r0 bottom value=100 (schematic designator R301)
R301_KCELL2 "R100 0805" R0805FTK 117.8,52.3 r270 bottom value=100 (schematic designator R301)
R302_KCELL1 "R10k-0805FTK" R0805FTK 28.52,22.2 r90 bottom value=10k (schematic designator R302)
R302_KCELL2 "R10k-0805FTK" R0805FTK 115.3,52.3 r90 bottom value=10k (schematic designator R302)
R303_KCELL1 "R100 0805" R0805FTK 15.4,25.75 r180 bottom value=100 (schematic designator R303)
R303_KCELL2 "R100 0805" R0805FTK 103.05,51.225 r270 bottom value=100 (schematic designator R303)
R304_KCELL1 "R10k-0805FTK" R0805FTK 18.75,22.6 r90 bottom value=10k (schematic designator R304)
R304_KCELL2 "R10k-0805FTK" R0805FTK 100.5,51.225 r90 bottom value=10k (schematic designator R304)
R401_NTC1 "R10k-0805FTK" R0805FTK 93.4,72.9 r180 top value=10k (schematic designator R401)
R401_NTC2 "R10k-0805FTK" R0805FTK 40.65,12 r180 bottom value=10k (schematic designator R401)
R401_NTC3 "R10k-0805FTK" R0805FTK 38.45,47.9 r90 bottom value=10k (schematic designator R401)
R401_NTC4 "R10k-0805FTK" R0805FTK 141.661,45.15 r270 bottom value=10k (schematic designator R401)
R402_NTC1 "R4.7k 0805" R0805FTK 93.4,70.8 r180 top value=4.7k (schematic designator R402)
R402_NTC2 "R4.7k 0805" R0805FTK 40.7,9.5 r180 bottom value=4.7k (schematic designator R402)
R402_NTC3 "R4.7k 0805" R0805FTK 36.35,47.9 r90 bottom value=4.7k (schematic designator R402)
R402_NTC4 "R4.7k 0805" R0805FTK 138.943,45.15 r270 bottom value=4.7k (schematic designator R402)
R501 "R60-0805FTN" R0805FTK 97.275,26.775 r180 top value="60.4R 0805"
R502 "R60-0805FTN" R0805FTK 93.425,26.775 r180 top value="60.4R 0805"
R601 "R10k_0805_0.25W" 0805#1 48.55,52.1 r180 bottom value=10k
R602 "R10k_0805_0.25W" 0805#1 50.8,52.1 r180 bottom value=10k
R603 "R10k_0805_0.25W" 0805#1 53.05,52.15 r180 bottom value=10k
R604 "R10k_0805_0.25W" 0805#1 55.4,52.1 r180 bottom value=10k
R605 "R10k_0805_0.25W" 0805#1 48.55,47.4 r180 bottom value=10k
R606 "R10k_0805_0.25W" 0805#1 50.8,47.4 r180 bottom value=10k
R607 "R10k_0805_0.25W" 0805#1 53.05,47.45 r180 bottom value=10k
R608 "R10k_0805_0.25W" 0805#1 55.4,47.4 r180 bottom value=10k
R609 "R470 0805" R0805FTK 71.6,65.075 r90 top value=470
R610 "R470 0805" R0805FTK 69,65.075 r90 top value=470
R611 "R470 0805" R0805FTK 66.4,65.075 r90 top value=470
R612 "R470 0805" R0805FTK 63.8,65.075 r90 top value=470
R701_CH1 "R10m-1206" WRIS-RSKS_1206_Wave 46.675,31.475 r0 top value=R10m (schematic designator R701)
R701_CH2 "R10m-1206" WRIS-RSKS_1206_Wave 121.05,41.05 r180 top value=R10m (schematic designator R701)
R702_CH1 "R10k-0805FTK" R0805FTK 52.575,15.775 r90 top value=10k (schematic designator R702)
R702_CH2 "R10k-0805FTK" R0805FTK 124.45,26.675 r90 bottom value=10k (schematic designator R702)
R703_CH1 "R10k-0805FTK" R0805FTK 54.75,15.7 r270 top value=10k (schematic designator R703)
R703_CH2 "R10k-0805FTK" R0805FTK 124.45,22.675 r90 bottom value=10k (schematic designator R703)
R801_DCH1 "R10k_0805_0.25W" 0805#1 27,63.5 r90 top value=10k (schematic designator R801)
R801_DCH2 "R10k_0805_0.25W" 0805#1 130.3,76.5 r90 top value=10k (schematic designator R801)
R802_DCH1 "R100 0805" R0805FTK 33.3,61 r180 top value=100 (schematic designator R802)
R802_DCH2 "R100 0805" R0805FTK 107.9,37.65 r90 top value=100 (schematic designator R802)
R803_DCH1 "R10k 0805" R0805FTK 48.475,57.095 r0 top value=10k (schematic designator R803)
R803_DCH2 "R10k 0805" R0805FTK 104.525,22.8 r180 top value=10k (schematic designator R803)
R804_DCH1 "R10k 0805" R0805FTK 48.475,59.3 r180 top value=10k (schematic designator R804)
R804_DCH2 "R10k 0805" R0805FTK 103.6,25.8 r90 top value=10k (schematic designator R804)
R805_DCH1 "R1k 0805" R0805FTK 33.3,58.5 r180 top value=1k (schematic designator R805)
R805_DCH2 "R1k 0805" R0805FTK 103.8,40.025 r90 top value=1k (schematic designator R805)
R806_DCH1 "MPT35A1R0F" RTO247 10.8,53.78 r270 top (schematic designator R806)
R806_DCH2 "MPT35A1R0F" RTO247 138.1,16.42 r90 top (schematic designator R806)
R807_DCH1 "MPT35A1R0F" RTO247 10.6,66.78 r270 top (schematic designator R807)
R807_DCH2 "MPT35A1R0F" RTO247 138.1,29.42 r90 top (schematic designator R807)
R808_DCH1 "MPT35A1R0F" RTO247 3.3,48.7 r90 top (schematic designator R808)
R808_DCH2 "MPT35A1R0F" RTO247 146.6,21.3 r270 top (schematic designator R808)
R809_DCH1 "MPT35A1R0F" RTO247 3.4,61.6 r90 top (schematic designator R809)
R809_DCH2 "MPT35A1R0F" RTO247 146.4,34.3 r270 top (schematic designator R809)
R901 "R100k-0805" RESC2013X70X40NL20T20 26.85,69.45 r270 top value=100k
R902 "R100k-0805" RESC2013X70X40NL20T20 24.158,77.65 r180 top value=100k
R903 "R100k-0805" RESC2013X70X40NL20T20 24,71.35 r0 top value=100k
R904 "R19.1k_0805" 0805#2 23.908,75.5 r0 top value=19.1k
R905 "R15K-0805" RESC2013X50X30ML20T20 26.6,80.05 r270 bottom value=15k
R906 "CR0805-FX-1000ELF" R0805FTK 51.1,80.3 r180 top
TP401_NTC1 "TestPoint" TestPoint#1 92.05,64 r180 top (schematic designator TP401)
TP401_NTC2 "TestPoint" TestPoint#2 39.25,2 r180 top (schematic designator TP401)
TP401_NTC3 "TestPoint" TestPoint#2 38.75,52.5 r90 top (schematic designator TP401)
TP401_NTC4 "TestPoint" TestPoint#1 131.161,45.2 r270 bottom (schematic designator TP401)
TP701_CH1 "TestPoint" TestPoint#1 40.625,30.425 r90 top (schematic designator TP701)
TP701_CH2 "TestPoint" TestPoint#1 126.75,48.85 r270 top (schematic designator TP701)
TP702_CH1 "TestPoint" TestPoint#1 48.475,19.6 r270 top (schematic designator TP702)
TP702_CH2 "TestPoint" TestPoint#1 120.4,29.6 r270 top (schematic designator TP702)
TP901 "TestPoint" TestPoint#2 33.587,80.75 r0 top
TP902 "TestPoint" TestPoint#1 46.118,78.828 r270 top
TP903 "TestPoint" TestPoint#1 50.15,66.8 r0 top
U101 "MCP3302-CI/SL" SOIC-SL14_L 75.6,17 r90 top
U201 "ST2378ETTR" TSSOP20_4P4X6P5_STM 74.95,30.25 r0 top
U501 "ATA6561-GAQW-N" FP-C04-057-OA-MFG 84.875,35.125 r0 top
U601 "STM32F105VCT6" STM-LQFP100_L 67.6,50.9 r180 top locked
U701_CH1 "MP2770" MP2770 48.1,16.2 r90 top (schematic designator U701)
U701_CH2 "MP2770" MP2770 118.75,25.625 r90 top (schematic designator U701)
U801_DCH1 "MCQ1805" SOIC127P600X175-8N 25,58 r90 top (schematic designator U801)
U801_DCH2 "MCQ1805" SOIC127P600X175-8N 129.7,68.8 r90 top (schematic designator U801)
U802_DCH1 "LM2904AVQDRQ1" SOIC127P600X175-8M 42,59 r0 top (schematic designator U802)
U802_DCH2 "LM2904AVQDRQ1" SOIC127P600X175-8M 103.6,31.8 r270 top (schematic designator U802)
U901 "MPQ4323GDE-AEC1" MPQ4323 28.95,75.5 r270 top
U902 "LM1117IMP-3.3/NOPB" LDO_10V-0.8/3V3-SOT223 50.1,72.75 r90 top
Y601 "830030819" WE-XTAL_CFPX-104 80.525,51.275 r180 top
Z101 "BZD27B5V1P-M3-08" SODFL370X108-2N 65.48,9.65 r180 top
Z102 "BZD27B5V1P-M3-08" SODFL370X108-2N 73.5,9.55 r180 top
Z103 "BZD27B5V1P-M3-08" SODFL370X108-2N 82,9.5 r180 top
Z104 "BZD27B5V1P-M3-08" SODFL370X108-2N 90,9.5 r180 top
Z401_NTC1 "BZD27B5V1P-M3-08" SODFL370X108-2N 93.5,66.7 r180 top (schematic designator Z401)
Z401_NTC2 "BZD27B5V1P-M3-08" SODFL370X108-2N 40.5,4.7 r180 bottom (schematic designator Z401)
Z401_NTC3 "BZD27B5V1P-M3-08" SODFL370X108-2N 32.25,47.8 r90 bottom (schematic designator Z401)
Z401_NTC4 "BZD27B5V1P-M3-08" SODFL370X108-2N 133.5,45.25 r270 bottom (schematic designator Z401)

## Footprints (in the part's own frame and the unit in brackets; to place one, negate y for a bottom-side part, rotate by r counter-clockwise, add the part's x,y. Pads: shape width x height; smd on the part's side, far side on the other; paste and mask are expansions set on the pad)
0805#1 [mm] "Chip Resistor, 2-Leads, Body 2,60x1,50mm, IPC Medium Density"
  rect 1.55x1.25 smd mask+0.055: 1(0,-1.05) 2(0,1.05)
  silkscreen extent -0.67,-0.05 0.67,0.05, body extent -0.75,-1.3 0.75,1.3, height 0.6
0805#2 [mm] "Chip Resistor, 2-Leads, Body 2,60x1,50mm, IPC Medium Density"
  rect 1.25x1.55 smd mask+0.055: 1(-1.05,0) 2(1.05,0)
  silkscreen extent -0.05,-0.67 0.05,0.67, body extent -1.3,-0.75 1.3,0.75, height 0.6
179838-2 [mm] "179838-2 TE Connectivity Power Connector"
  rrect50% 2x1.524 hole 1.4 mask+0.055: 1(0,0) 2(3.96,0)
  body extent -2.53,-4.7 6.53,5.8, height 16
C0805FNPC-R [mm]
  rect 0.9x1.3 smd mask+0.055: 1(-0.95,0) 2(0.95,0)
  silkscreen extent -0.15,-0.65 0.15,0.65, body extent -1.03,-0.63 0.97,0.63, height 0.96
C0805FNPC-W [mm]
  rect 0.9x1.3 smd mask+0.055: 1(-1.15,0) 2(1.15,0)
  silkscreen extent -0.35,-0.65 0.35,0.65, body extent -1,-0.63 1,0.63, height 0.96
CAPC1608X92X38LL15T08 [mm] "Chip Capacitor, 2-Leads, Body 1.60x0.80mm, IPC High Density"
  rect 0.75x0.9 smd mask+0.055: 1(-0.625,0) 2(0.625,0)
  body extent -0.87,-0.48 0.87,0.48, height 0.92
CAPM3216X18N [mm]
  rect 1.8x2.3 smd mask+0.055: 1(-1.6,0) 2(1.6,0)
  silkscreen extent -3.07,-2 2.3,2, body extent -2.5,-1.97 2.5,1.97, height 2.44
DSC-SOD123 [mm] "SOIC, 2-Leads, Body 1,60x2,69mm, Pitch 1,27mm, IPC Low Density"
  rrect50% 1.1x1.3 smd mask+0.055: A(1.75,0) K(-1.75,0)
  silkscreen extent -1.87,-0.9 1,1.32, body extent -1.86,-0.8 1.86,0.8, height 1.36
DTVS-DO-214AC [mm] "Molded Diode, 2-Leads, Body 5,11x2,67mm, IPC Medium Density"
  rrect50% 2.5x1.7 smd mask+0.055: 1(-1.975,0) 2(1.975,0)
  silkscreen extent -2.7,-1.4 3.47,1.53, body extent -2.56,-1.34 2.56,1.34, height 2.5
FP-105309-1102-MFG [mm]
  round 1.85 hole 1.2 paste-2539.97 mask+0.055: 1(-1.25,1.43) 2(1.25,1.43)
  round 1.3 hole 1.3 unplated paste-2539.97 mask+0.055: ""(0,0.09)
  silkscreen extent -3.75,-3.27 3.07,3.27, body extent -3.17,-3.37 3.17,3.37, height 0.25
FP-1415899-7-MFG [mm]
  round 2 hole 1.3 paste-2539.97 mask+0.055: 11(8.15,3.75) 12(4.65,-3.75) 14(11.65,-3.75) A2(-12.15,3.75)
  rect 2x2 hole 1.3 paste-2539.97 mask+0.055: A1(-12.15,-3.75)
  silkscreen extent -15.2,-6.35 14.5,6.35, body extent -14.6,-6.45 14.6,6.45, height 0.25
FP-C04-057-OA-MFG [mm]
  rect 1.55x0.6 smd paste+0 mask+0.055: 1(-2.7,1.905) 2(-2.7,0.635) 3(-2.7,-0.635) 4(-2.7,-1.905) 5(2.7,-1.905) 6(2.7,-0.635) 7(2.7,0.635) 8(2.7,1.905)
  silkscreen extent -4.15,-2.5 1.5,2.5, body extent -3.57,-2.75 3.57,2.75, height 0.25
FP-DLW32PH-MFG [mm]
  rect 1.05x0.6 smd paste+0 mask+0.055: 1(-1.525,0.5) 2(1.525,0.5) 3(1.525,-0.5) 4(-1.525,-0.5)
  silkscreen extent -2.72,-1.35 1.7,1.35, body extent -2.15,-1.45 2.15,1.45, height 0.25
FP-GRM32E-0_3-0_2-IPC_C#1 [mm]
  rect 1.703x2.606 smd paste+0 mask+0.055: 1(-1.051,0) 2(1.051,0)
  silkscreen extent -1.9,-1.75 1.9,1.75, body extent -2,-1.45 2,1.45, height 0.25
FP-GRM32E-0_3-0_2-IPC_C#2 [mm]
  rect 1.703x2.606 smd paste+0 mask+0: 1(-1.051,0) 2(1.051,0)
  silkscreen extent -1.9,-1.75 1.9,1.75, body extent -2,-1.45 2,1.45, height 0.25
J_NanoFit_1x4_V [mm]
  round 1.4 hole 1.4 mask+0.055: 0(0,-1.34)
  rect 1.8x1.8 hole 1.2 mask+0.055: 1(3.75,0)
  round 1.8 hole 1.2 mask+0.055: 2(1.25,0) 3(-1.25,0) 4(-3.75,0)
  silkscreen extent -5.5,-4.5 5.5,1.8, body extent -5.47,-4.65 5.47,1.69, height 10.68
J_STLink_PinHeader [mm] "Pin Header, pitch 2.54 mm, THT, Vertical, single row, 6p"
  rrect50% 1.6x1.6 hole 1.1 mask+0.055: 1(-6.35,0)
  round 1.6 hole 1.1 mask+0.055: 2(-3.81,0) 3(-1.27,0) 4(1.27,0) 5(3.81,0) 6(6.35,0)
  silkscreen extent -8.34,-1.35 7.77,1.35, body extent -7.62,-1.27 7.62,1.27, height 8.57
L_Ferrite_bead_0805 [mm] "Chip Inductor, 2-Leads, Body 1,60x0,80mm, IPC Low Density"
  rrect50% 1.22x1.08 smd mask+0.055: 1(-0.84,0) 2(0.84,0)
  body extent -0.88,-0.48 0.87,0.47, height 0.65
LDO_10V-0.8/3V3-SOT223 [mm] "SOT223, 4-Leads, Body 6,50x7,00mm (avg), Pitch 2,30mm, IPC Low Density"
  rrect50% 2.1x1 smd mask+0.055: 1(-3.15,2.3) 2(-3.15,0) 3(-3.15,-2.3)
  rrect50% 2.1x3.3 smd mask+0.055: 4(3.15,0)
  silkscreen extent -3.27,-3.35 1.8,3.47, body extent -3.5,-3.25 3.5,3.25, height 1.81
LED_0805_WE [mm] "SODFL, 2-Leads, Body 1,60x3,20mm, IPC Medium Density"
  rrect50% 1.1x1.2 smd mask+0.055: A(1.05,0) K(-1.05,0)
  silkscreen extent -2.15,1.05 -2.05,1.15, body extent -1,-0.62 1,0.63, height 0.7
Mounting_Hole_M4#1 [mm]
  round 7 hole 4.2: 1(0,0)
  round 7 smd far side: 1(0,0)
Mounting_Hole_M4#2 [mm]
  round 7 smd: 1(0,0)
  round 7 hole 4.2: 1(0,0)
MP2770 [mm] "MP2770"
  rect 0.9x0.3 smd mask+0.055: 1(-1.35,0.975) 10(1.35,-0.975) 11(1.35,-0.325) 12(1.35,0.325) 13(1.35,0.975)
  rect 1.5x0.3 smd mask+0.055: 2(-1.05,0.325) 3(-1.05,-0.325) 4(-1.05,-0.975)
  round 0.025 smd mask+0.055: 5(-1.551,-1.771) 9(1.164,-2.101) 14(1.551,1.771) 18(-1.164,2.101)
  rect 0.3x0.9 smd mask+0.055: 6(-0.5,-1.85) 7(0,-1.85) 8(0.5,-1.85) 15(0.5,1.85) 16(0,1.85) 17(-0.5,1.85)
  Top Layer region: 0.901,1.471 0.901,2.296 1.301,2.296 1.301,1.771 1.801,1.771 1.801,1.471
  Top Layer region: 0.899,-1.466 1.799,-1.466 1.799,-1.766 1.574,-1.766 1.299,-1.766 1.299,-2.291 0.899,-2.291 0.899,-2
  Top Layer region: -0.901,-1.471 -0.901,-2.296 -1.301,-2.296 -1.301,-1.771 -1.801,-1.771 -1.801,-1.471
  Top Layer region: -0.899,1.466 -1.799,1.466 -1.799,1.766 -1.574,1.766 -1.299,1.766 -1.299,2.291 -0.899,2.291 -0.899,2
  silkscreen extent -2.47,-2.2 1.7,2.2, body extent -1.55,-2.05 1.55,2.05, height 1
MPQ4323 [mm] "36V-3A-DCDC-QFN_Footprint"
  rect 0.8x0.25 smd mask+0.055: 1(-0.85,1.125) 2(-0.85,0.475) 3(-0.85,-0.175) 4(-0.85,-0.675) 8(0.85,-0.675) 9(0.85,-0.175) 10(0.85,0.475) 11(0.85,1.125)
  rect 0.25x0.8 smd mask+0.055: 5(-0.5,-1.4) 6(0,-1.4) 7(0.5,-1.4)
  rect 0.25x1.8 smd mask+0.055: 12(0,0.9)
  silkscreen extent -1.97,-1.7 1.2,1.7, body extent -1.05,-1.55 1.05,1.55, height 1
R0805FTK [mm] "Chip Resistor, 2-Leads, Body 2,00x1,25mm, IPC Medium Density"
  rect 1.15x1.35 smd mask+0.055: 1(-0.925,0) 2(0.925,0)
  body extent -1,-0.63 1,0.63, height 0.65
RESC2012X10N [mm] "Chip Resistor, 2-Leads, Body 2,00x1,25mm, IPC Medium Density"
  rect 1x1.3 smd mask+0.055: 1(-1,0) 2(1,0)
  body extent -1.1,-0.7 1.1,0.7, height 0.95
RESC2013X50X30ML20T20 [mm] "Chip Resistor, 2-Leads, Body 2.00x1.25mm, IPC Low Density"
  rect 1.25x1.55 smd mask+0.055: 1(-1.025,0) 2(1.025,0)
  silkscreen extent -0.1,-0.67 0.1,0.67, body extent -1.1,-0.72 1.1,0.72, height 0.5
RESC2013X70X40NL20T20 [mm] "Chip Resistor, 2-Leads, Body 2.00x1.25mm, IPC Medium Density"
  rect 1.15x1.45 smd mask+0.055: 1(-0.875,0) 2(0.875,0)
  body extent -1.1,-0.72 1.1,0.72, height 0.7
RTO247 [mm]
  round 2 hole 1.5 mask+0.055: 1(5.08,0) 2(0,0)
  body extent -2.58,-4.03 16.8,2.1, height 18.5
SIHP25N60EFL-BE3-Footprint-1 [mm]
  rect 1.8x1.8 hole 1.3 mask+0.055: 1(-2.6,0)
  round 1.8 hole 1.3 mask+0.055: 2(0,0) 3(2.6,0)
  body extent -5.12,-1.54 5.12,2.91, height 19.89
SODFL370X108-2N [mm] "SODFL, 2-Leads, Body 1.80x3.70mm, IPC Medium Density"
  rect 1.3x1.4 smd mask+0.055: 1(-1.45,0) 2(1.45,0)
  silkscreen extent -2.05,0.95 -1.95,1.05, body extent -1.45,-0.95 1.45,0.95, height 1.08
SOIC127P600X175-8M [mm] "SOIC, 8-Leads, Body 4,91x3,90mm, Pitch 1,27mm, IPC Low Density"
  rect 1.65x0.65 smd mask+0.055: 1(-2.7,1.905) 2(-2.7,0.635) 3(-2.7,-0.635) 4(-2.7,-1.905) 5(2.7,-1.905) 6(2.7,-0.635) 7(2.7,0.635) 8(2.7,1.905)
  silkscreen extent -2.82,-2.5 1.6,2.9, body extent -3,-2.5 3,2.5, height 1.75
SOIC127P600X175-8N [mm] "SOIC, 8-Leads, Body 4.90x3.90mm, Pitch 1.27mm, IPC Medium Density"
  rect 1.6x0.61 smd mask+0.055: 1(-2.7,1.905) 2(-2.7,0.635) 3(-2.7,-0.635) 4(-2.7,-1.905) 5(2.7,-1.905) 6(2.7,-0.635) 7(2.7,0.635) 8(2.7,1.905)
  silkscreen extent -2.82,-2.5 1.6,2.88, body extent -3,-2.5 3,2.5, height 1.75
SOIC-SL14_L [mm] "SOIC, 14-Leads, Body 8.7x3.9mm, Pitch 1.27mm, IPC High Density"
  oval 1.9x0.6 smd mask+0.055: 1(-2.35,3.81) 2(-2.35,2.54) 3(-2.35,1.27) 4(-2.35,0) 5(-2.35,-1.27) 6(-2.35,-2.54) 7(-2.35,-3.81) 8(2.35,-3.81) 9(2.35,-2.54) 10(2.35,-1.27) 11(2.35,0) 12(2.35,1.27) 13(2.35,2.54) 14(2.35,3.81)
  silkscreen extent -2.47,-4.4 1,4.78, body extent -2,-4.38 2,4.38, height 1.75
SOT95P245X110-3N [mm] "SOT23, 3-Leads, Body 2,90x2,45mm, Pitch 0,95mm, IPC Medium Density"
  rect 1x0.6 smd mask+0.055: D(1.2,0) G(-1.2,0.95) S(-1.2,-0.95)
  silkscreen extent -1.33,-1.5 0.7,1.92, body extent -1.3,-1.5 1.3,1.5, height 1.1
STM-LQFP100_L [mm] "Thin QFP, 100-Leads, Body 14x14mm, Pitch 0.5mm, IPC High Density"
  oval 1.55x0.25 smd mask+0.055: 1(-7.525,6) 2(-7.525,5.5) 3(-7.525,5) 4(-7.525,4.5) 5(-7.525,4) 6(-7.525,3.5) 7(-7.525,3) 8(-7.525,2.5) 9(-7.525,2) 10(-7.525,1.5) 11(-7.525,1) 12(-7.525,0.5) 13(-7.525,0) 14(-7.525,-0.5) 15(-7.525,-1) 16(-7.525,-1.5) 17(-7.525,-2) 18(-7.525,-2.5) 19(-7.525,-3) 20(-7.525,-3.5) 21(-7.525,-4) 22(-7.525,-4.5) 23(-7.525,-5) 24(-7.525,-5.5) 25(-7.525,-6) 51(7.525,-6) 52(7.525,-5.5) 53(7.525,-5) 54(7.525,-4.5) 55(7.525,-4) 56(7.525,-3.5) 57(7.525,-3) 58(7.525,-2.5) 59(7.525,-2) 60(7.525,-1.5) 61(7.525,-1) 62(7.525,-0.5) 63(7.525,0) 64(7.525,0.5) 65(7.525,1) 66(7.525,1.5) 67(7.525,2) 68(7.525,2.5) 69(7.525,3) 70(7.525,3.5) 71(7.525,4) 72(7.525,4.5) 73(7.525,5) 74(7.525,5.5) 75(7.525,6)
  oval 0.25x1.55 smd mask+0.055: 26(-6,-7.525) 27(-5.5,-7.525) 28(-5,-7.525) 29(-4.5,-7.525) 30(-4,-7.525) 31(-3.5,-7.525) 32(-3,-7.525) 33(-2.5,-7.525) 34(-2,-7.525) 35(-1.5,-7.525) 36(-1,-7.525) 37(-0.5,-7.525) 38(0,-7.525) 39(0.5,-7.525) 40(1,-7.525) 41(1.5,-7.525) 42(2,-7.525) 43(2.5,-7.525) 44(3,-7.525) 45(3.5,-7.525) 46(4,-7.525) 47(4.5,-7.525) 48(5,-7.525) 49(5.5,-7.525) 50(6,-7.525) 76(6,7.525) 77(5.5,7.525) 78(5,7.525) 79(4.5,7.525) 80(4,7.525) 81(3.5,7.525) 82(3,7.525) 83(2.5,7.525) 84(2,7.525) 85(1.5,7.525) 86(1,7.525) 87(0.5,7.525) 88(0,7.525) 89(-0.5,7.525) 90(-1,7.525) 91(-1.5,7.525) 92(-2,7.525) 93(-2.5,7.525) 94(-3,7.525) 95(-3.5,7.525) 96(-4,7.525) 97(-4.5,7.525) 98(-5,7.525) 99(-5.5,7.525) 100(-6,7.525)
  silkscreen extent -7.65,-6.35 6.35,6.8, body extent -7,-7 7,7, height 1.6
TestPoint#1 [mm]
  round 2 smd mask+0.055: 1(0,0)
TestPoint#2 [mm]
  round 2 smd far side mask+0.055: 1(0,0)
TSSOP20_4P4X6P5_STM [mm]
  rect 1.455x0.355 smd paste+0 mask+0.055: 1(-2.925,2.925) 2(-2.925,2.275) 3(-2.925,1.625) 4(-2.925,0.975) 5(-2.925,0.325) 6(-2.925,-0.325) 7(-2.925,-0.975) 8(-2.925,-1.625) 9(-2.925,-2.275) 10(-2.925,-2.925) 11(2.925,-2.925) 12(2.925,-2.275) 13(2.925,-1.625) 14(2.925,-0.975) 15(2.925,-0.325) 16(2.925,0.325) 17(2.925,0.975) 18(2.925,1.625) 19(2.925,2.275) 20(2.925,2.925)
  body extent -3.3,-3.2 3.3,3.2, height 1.2
WCAP-CSGP_0805_L2W1.25H0.6_Reflow [mm] "Ceramic Capacitors, body 2x1.25mm"
  rect 0.9x1.3 smd mask+0.055: 1(-0.95,0) 2(0.95,0)
  body extent -1,-0.63 1,0.63, height 0.6
WCAP-CSGP_0805_L2W1.25H0.8_Reflow [mm] "Ceramic Capacitors, body 2x1.25mm"
  rect 0.9x1.3 smd mask+0.055: 1(-0.95,0) 2(0.95,0)
  body extent -1,-0.62 1,0.63, height 0.8
WCAP-CSGP_0805_L2W1.25H1.25#1 [mm] "Ceramic Capacitors, body 2x1.25mm"
  rect 0.9x1.3 smd: 1(-0.95,0) 2(0.95,0)
  body extent -1,-0.63 1,0.63, height 1.25
WCAP-CSGP_0805_L2W1.25H1.25#2 [mm] "Ceramic Capacitors, body 2x1.25mm"
  rect 0.9x1.3 smd mask+0.055: 1(-0.95,0) 2(0.95,0)
  body extent -1,-0.63 1,0.63, height 1.25
WE-PD_7345 [mm] "SMT Shielded Power Inductor, 2-leads, body 7.3x7.3mm"
  rect 1.6x2.2 smd mask+0.055: 1(-3.2,0) 2(3.2,0)
  Top Layer keep-out region: -3.65,-3.65 -3.65,-1.3 -2.2,-1.3 -2.2,1.3 -3.65,1.3 -3.65,3.65 3.65,3.65 3.65,1.3 2.2,1.3 2.2,-1.3 3.65,-1.3 3.65,-3.65
  silkscreen extent -4.62,-3.75 3.75,3.75, body extent -3.65,-3.65 3.65,3.65, height 3.91
WE-XTAL_CFPX-104 [mm] "Quartz Crystal, size CFPX-104, body 5x3.2mm"
  rect 1.6x1.4 smd mask+0.055: 1(-1.9,-1.15) 2(1.9,-1.15) 3(1.9,1.15) 4(-1.9,1.15)
  silkscreen extent -3.24,-1.65 0.8,1.65, body extent -2.5,-1.6 2.5,1.6, height 0.95
WRIS-RSKS_1206_Wave [mm] "Fixed Thick Film, body 3.10 x 1.60 mm"
  rect 1.25x1.7 smd mask+0.055: 1(-1.775,0) 2(1.775,0)
  body extent -1.55,-0.8 1.55,0.8, height 0.6

## Part data
C101 C102 C103 C104 C105 C106 C201 C202 C501 C502 C505 C603 C604 C605 C606 C607 C803_DCH1 C803_DCH2 C907 C908: library part CMP-00063-1, "Cap, 0.1ΜF, 50V, 10%, X7R, 0805", Case Code (Metric)=2012, Case/Package=0805, Dielectric=X7R, Manufacturer 1="Wurth Electronics", Manufacturer Part Number 1=885012207098, Max Operating Temperature=125°C, Min Operating Temperature=-55°C, Tolerance=10%, Voltage Rating=50V, .Creator=DR, Category="Ceramic Capacitors", ComponentLink1Description=http://www.farnell.com/datasheets/1958498.pdf?src-supplier=Farnell, ComponentLink1URL=http://www.farnell.com/datasheets/1958498.pdf?src-supplier=Farnell, ComponentLink2Description=http://www.farnell.com/datasheets/1958498.pdf?src-supplier=Element14, ComponentLink2URL=http://www.farnell.com/datasheets/1958498.pdf?src-supplier=Element14, ComponentLink3Description=https://katalog.we-online.de/pbs/datasheet/885012207098.pdf?src-supplier=Digi-Key, ComponentLink3URL=https://katalog.we-online.de/pbs/datasheet/885012207098.pdf?src-supplier=Digi-Key, ComponentLink4Description=http://www.farnell.com/datasheets/1958498.pdf?src-supplier=Newark, ComponentLink4URL=http://www.farnell.com/datasheets/1958498.pdf?src-supplier=Newark, Design Item ID=C100n-50V-0805FNPC-X7R, Length=0.079inch, Mount="Surface Mount", Packaging="Cut Tape", Pricing 1="100=0,10200, 500=0,07100, 2000=0,06100 (GBP)", REACH SVHC=Unknown, RoHS=Yes, RoHS Compliant=Yes, Source=Passives.SchLib, Stock 1=8000, Thickness=0.035inch, Voltage Rating (DC)=50V, Width=0.049inch
C401_NTC1 C401_NTC2 C401_NTC3 C401_NTC4 C402_NTC1 C402_NTC2 C402_NTC3 C402_NTC4 C601 C602: library part CMP-00063-3, "Cap, 0.1ΜF, 50V, 10%, X7R, 0805", Case Code (Metric)=2012, Case/Package=0805, Dielectric=X7R, Manufacturer 1="Wurth Electronics", Manufacturer Part Number 1=885012207098, Max Operating Temperature=125°C, Min Operating Temperature=-55°C, Tolerance=10%, Voltage Rating=50V, .Creator=DR, Category="Ceramic Capacitors", ComponentLink1Description=http://www.farnell.com/datasheets/1958498.pdf?src-supplier=Farnell, ComponentLink1URL=http://www.farnell.com/datasheets/1958498.pdf?src-supplier=Farnell, ComponentLink2Description=http://www.farnell.com/datasheets/1958498.pdf?src-supplier=Element14, ComponentLink2URL=http://www.farnell.com/datasheets/1958498.pdf?src-supplier=Element14, ComponentLink3Description=https://katalog.we-online.de/pbs/datasheet/885012207098.pdf?src-supplier=Digi-Key, ComponentLink3URL=https://katalog.we-online.de/pbs/datasheet/885012207098.pdf?src-supplier=Digi-Key, ComponentLink4Description=http://www.farnell.com/datasheets/1958498.pdf?src-supplier=Newark, ComponentLink4URL=http://www.farnell.com/datasheets/1958498.pdf?src-supplier=Newark, Design Item ID=C100n-50V-0805FNPC-X7R, Length=0.079inch, Mount="Surface Mount", Packaging="Cut Tape", Pricing 1="100=0,10200, 500=0,07100, 2000=0,06100 (GBP)", REACH SVHC=Unknown, RoHS=Yes, RoHS Compliant=Yes, Source=Passives.SchLib, Stock 1=8000, Thickness=0.035inch, Voltage Rating (DC)=50V, Width=0.049inch
C503 C504 C506 C507 C508: library part CMP-00068-1, "Multilayer Ceramic Capacitor, Wcap-Csgp Series, 100 Pf, 5%, C0G / Np0, 50 V, 0805 [2012 Metric] Rohs Compliant: Yes", Case Code (Metric)=2012, Case/Package=0805, Dielectric=C0G, Manufacturer="Wurth Electronics", Manufacturer Part Number=885012007057, Max Operating Temperature=125°C, Min Operating Temperature=-55°C, Tolerance=5%, Voltage Rating=50V, .Creator=DR, Category="Ceramic Capacitors", ComponentLink1Description=http://www.farnell.com/datasheets/1958443.pdf?src-supplier=Farnell, ComponentLink1URL=http://www.farnell.com/datasheets/1958443.pdf?src-supplier=Farnell, ComponentLink2Description=https://katalog.we-online.de/pbs/datasheet/885012007057.pdf?src-supplier=Digi-Key, ComponentLink2URL=https://katalog.we-online.de/pbs/datasheet/885012007057.pdf?src-supplier=Digi-Key, ComponentLink3Description=http://www.farnell.com/datasheets/1958443.pdf?src-supplier=Element14, ComponentLink3URL=http://www.farnell.com/datasheets/1958443.pdf?src-supplier=Element14, ComponentLink4Description=http://www.farnell.com/datasheets/1958443.pdf?src-supplier=Newark, ComponentLink4URL=http://www.farnell.com/datasheets/1958443.pdf?src-supplier=Newark, ComponentLink5Description="Where buy it", ComponentLink5URL=https://www.we-online.com/catalog/en/WCAP-CSGP-50VDC#885012007057, Design Item ID=C100p-50V-0805FNPC-C0G/NP0, Length=0.079inch, Mount="Surface Mount", Packaging="Cut Tape", Pricing 1="4000=0,03900, 12000=0,03800 (USD)", REACH SVHC=Unknown, RoHS=Yes, RoHS Compliant=Yes, Source=Passives.SchLib, Stock 1=1, Thickness=0.035inch, Voltage Rating (DC)=50V, Width=0.049inch
C608 C609 C904: library part CMP-001-00012-2, "Ceramic Capacitor, Multilayer, Ceramic, 50V, 5% +Tol, 5% -Tol, C0G, 30ppm/Cel TC, 0.00001uF, Surface Mount, 0805. 885012007051", Capacitor Type=Ceramic, Pins=2, RoHS Compliant=Yes
C701_CH1 C701_CH2: library part CMP-001-00026-1, "Ceramic Capacitor, Multilayer, Ceramic, 25V, 5% +Tol, 5% -Tol, X7R, 15% TC, 0.1uF, Surface Mount, 0603. PN: VJ0603Y104JXXAC.", Capacitor Type=Ceramic, Case/Package=0603, Max Operating Temperature=125°C, Min Operating Temperature=-55°C, Mounting Technology="Surface Mount", Pins=2, RoHS Compliant=Yes
C702_CH1 C702_CH2 C703_CH1 C703_CH2: library part CMP-001-00029-1, "Ceramic Capacitor, Multilayer, Ceramic, 25V, 20% +Tol, 20% -Tol, X5R, 15% TC, 22uF, Surface Mount, 0805. PN: C2012X5R1E226M125AC.", Capacitor Type=Ceramic, Case/Package=0805, Max Operating Temperature=85°C, Min Operating Temperature=-55°C, Mounting Technology="Surface Mount", Pins=2, RoHS Compliant=Yes
C704_CH1 C704_CH2 C705_CH1 C705_CH2 C902 C903 C905 C906: library part CMP-001-00003-4, "Ceramic Capacitor, Multilayer, Ceramic, 10V, 10% +Tol, 10% -Tol, X6S, 22% TC, 47uF, Surface Mount, 1210", Capacitor Type=Ceramic, Case/Package=1210, Max Operating Temperature=105°C, Min Operating Temperature=-55°C, Mounting Technology="Surface Mount", Pins=2, RoHS Compliant=Yes
C706_CH1 C706_CH2 C801_DCH1 C801_DCH2: library part CMP-001-00010-5, "Ceramic Capacitor, Multilayer, Ceramic, 16V, 10% +Tol, 10% -Tol, X7R, 15% TC, 1uF, Surface Mount, 0805", Capacitor Type=Ceramic, Pins=2, RoHS Compliant=Yes
C802_DCH1 C802_DCH2: library part CMP-00068-3, "Multilayer Ceramic Capacitor, Wcap-Csgp Series, 100 Pf, 5%, C0G / Np0, 50 V, 0805 [2012 Metric] Rohs Compliant: Yes", Case Code (Metric)=2012, Case/Package=0805, Dielectric=C0G, Manufacturer="Wurth Electronics", Manufacturer Part Number=885012007057, Max Operating Temperature=125°C, Min Operating Temperature=-55°C, Tolerance=5%, Voltage Rating=50V, .Creator=DR, Category="Ceramic Capacitors", ComponentLink1Description=http://www.farnell.com/datasheets/1958443.pdf?src-supplier=Farnell, ComponentLink1URL=http://www.farnell.com/datasheets/1958443.pdf?src-supplier=Farnell, ComponentLink2Description=https://katalog.we-online.de/pbs/datasheet/885012007057.pdf?src-supplier=Digi-Key, ComponentLink2URL=https://katalog.we-online.de/pbs/datasheet/885012007057.pdf?src-supplier=Digi-Key, ComponentLink3Description=http://www.farnell.com/datasheets/1958443.pdf?src-supplier=Element14, ComponentLink3URL=http://www.farnell.com/datasheets/1958443.pdf?src-supplier=Element14, ComponentLink4Description=http://www.farnell.com/datasheets/1958443.pdf?src-supplier=Newark, ComponentLink4URL=http://www.farnell.com/datasheets/1958443.pdf?src-supplier=Newark, ComponentLink5Description="Where buy it", ComponentLink5URL=https://www.we-online.com/catalog/en/WCAP-CSGP-50VDC#885012007057, Design Item ID=C100p-50V-0805FNPC-C0G/NP0, Length=0.079inch, Mount="Surface Mount", Packaging="Cut Tape", Pricing 1="4000=0,03900, 12000=0,03800 (USD)", REACH SVHC=Unknown, RoHS=Yes, RoHS Compliant=Yes, Source=Passives.SchLib, Stock 1=1, Thickness=0.035inch, Voltage Rating (DC)=50V, Width=0.049inch
C901: library part CMP-001-00011-1, "Ceramic Capacitor, Ceramic", Capacitor Type=Ceramic, Pins=2, RoHS Compliant=Yes
C909: library part CMP-00052-1, "Multilayer Ceramic Capacitor, Wcap-Csgp Series, 1 F, 10%, X7R, 50 V, 0805 [2012 Metric] Rohs Compliant: Yes", Case Code (Metric)=2012, Case/Package=0805, Dielectric=X7R, Manufacturer 1="Wurth Electronics", Manufacturer Part Number 1=885012207103, Max Operating Temperature=85°C, Min Operating Temperature=-55°C, Tolerance=10%, Voltage Rating=50V, .Creator=GP, Category="Ceramic Capacitors", ComponentLink1Description=http://www.farnell.com/datasheets/1958501.pdf?src-supplier=Farnell, ComponentLink1URL=http://www.farnell.com/datasheets/1958501.pdf?src-supplier=Farnell, ComponentLink2Description=http://www.farnell.com/datasheets/1958501.pdf?src-supplier=Element14, ComponentLink2URL=http://www.farnell.com/datasheets/1958501.pdf?src-supplier=Element14, ComponentLink3Description=https://katalog.we-online.de/pbs/datasheet/885012107003.pdf?src-supplier=Digi-Key, ComponentLink3URL=https://katalog.we-online.de/pbs/datasheet/885012107003.pdf?src-supplier=Digi-Key, ComponentLink4Description=http://www.farnell.com/datasheets/1958501.pdf?src-supplier=Newark, ComponentLink4URL=http://www.farnell.com/datasheets/1958501.pdf?src-supplier=Newark, Design Item ID=C1u-50V-0805FNPC-X7R, Length=0.079inch, Mount="Surface Mount", Packaging="Cut Tape", Pricing 1="50=0,27200, 250=0,25300, 500=0,22800, 1250=0,20100, 2500=0,17100 (GBP)", REACH SVHC=Unknown, RoHS=Yes, RoHS Compliant=Yes, Source=Passives.SchLib, Stock 1=5100, Thickness=0.053inch, Voltage Rating (DC)=50V, Width=0.049inch
C910 C911: library part CMP-00055-6, "Multilayer Ceramic Capacitor, Wcap-Csgp Series, 10 F, 20%, X5R, 16 V, 0805 [2012 Metric] Rohs Compliant: Yes", Case Code (Metric)=2012, Case/Package=0805, Dielectric=X5R, Manufacturer 1="Wurth Electronics", Manufacturer Part Number 1=885012107014, Max Operating Temperature=85°C, Min Operating Temperature=-55°C, Tolerance=20%, Voltage Rating=16V, .Creator=DR, Category="Ceramic Capacitors", ComponentLink1Description=http://www.farnell.com/datasheets/1958454.pdf?src-supplier=Farnell, ComponentLink1URL=http://www.farnell.com/datasheets/1958454.pdf?src-supplier=Farnell, ComponentLink2Description=http://www.farnell.com/datasheets/1958454.pdf?src-supplier=Element14, ComponentLink2URL=http://www.farnell.com/datasheets/1958454.pdf?src-supplier=Element14, ComponentLink3Description=https://katalog.we-online.de/pbs/datasheet/885012107014.pdf?src-supplier=Digi-Key, ComponentLink3URL=https://katalog.we-online.de/pbs/datasheet/885012107014.pdf?src-supplier=Digi-Key, ComponentLink4Description=http://www.farnell.com/datasheets/1958454.pdf?src-supplier=Newark, ComponentLink4URL=http://www.farnell.com/datasheets/1958454.pdf?src-supplier=Newark, Design Item ID=C10u-16V-0805FNPC-X5R, Length=0.079inch, Mount="Surface Mount", Packaging="Cut Tape", Pricing 1="50=0,21000, 250=0,20200, 500=0,19100, 1000=0,17400, 2500=0,14700 (GBP)", REACH SVHC=Unknown, RoHS=Yes, RoHS Compliant=Yes, Source=Passives.SchLib, Stock 1=81550, Thickness=0.057inch, Voltage Rating (DC)=16V, Width=0.049inch
D1 D2 D501 D502: library part CMP-00154-1, "TVS diode [Würth Elektronik] 824501600 TVS diode", Clamping Voltage=10.3V, Forward Voltage=7.02V, Manufacturer="Wurth Electronics", Manufacturer Part Number=824501600, Max Operating Temperature=150°C, Min Operating Temperature=-65°C, Peak Pulse Current=38.8A, Peak Pulse Power=400W, Power Line Protection=No, Resistor Type=Zener, Reverse Standoff Voltage=6V, .Creator=DO, Category="TVS Diodes", ComponentLink1Description="Where buy it", ComponentLink1URL=https://www.we-online.com/catalog/en/WE-TVSP?sq=824501600#824501600, ComponentLink2Description=http://www.farnell.com/datasheets/2036401.pdf?src-supplier=Element14, ComponentLink2URL=http://www.farnell.com/datasheets/2036401.pdf?src-supplier=Element14, ComponentLink3Description=https://katalog.we-online.de/pbs/datasheet/824501600.pdf?src-supplier=Digi-Key, ComponentLink3URL=https://katalog.we-online.de/pbs/datasheet/824501600.pdf?src-supplier=Digi-Key, Design Item ID=DTVS-6V-DO-214AC, Min Breakdown Voltage=7.02V, Mount="Surface Mount", Number of Bidirectional Channels=1, Packaging="Cut Tape", Pins=2, Polarity=Bidirectional, Pricing 1="1=0,28000, 10=0,26100, 50=0,26100, 100=0,23400, 500=0,20400, 1000=0,17400, 10000=0,17400 (USD)", REACH SVHC=Unknown, RoHS=Yes, RoHS Compliant=Yes, Source="Filter components.SchLib", Stock 1=780
D301_KCELL1 D301_KCELL2 D302_KCELL1 D302_KCELL2: library part CMP-00165-2, "VR=30V IF=500mA 30pF P=410mW", Average Rectified Current=500mA, Forward Voltage=430mV, Max Forward Surge Current (Ifsm)=5.5A, Max Repetitive Reverse Voltage (Vrrm)=30V, Max Reverse Current=130uA, Package Quantity=1, .Creator=GP, Category=Diode, ComponentLink1Description=Datasheet, ComponentLink2Description="Where buy it", ComponentLink3Description=https://datasheet.ciiva.com/30479/0900766b810e2512-30479401.pdf?src-supplier=RSComponents, ComponentLink3URL=https://datasheet.ciiva.com/30479/0900766b810e2512-30479401.pdf?src-supplier=RSComponents, ComponentLink4Description=https://datasheet.ciiva.com/34301/974753-34301826.pdf?src-supplier=Jameco, ComponentLink4URL=https://datasheet.ciiva.com/34301/974753-34301826.pdf?src-supplier=Jameco, ComponentLink5Description=https://datasheet.ciiva.com/910/mbr0530-910516.pdf?src-supplier=Digi-Key, ComponentLink5URL=https://datasheet.ciiva.com/910/mbr0530-910516.pdf?src-supplier=Digi-Key, ComponentLink6Description=https://datasheet.ciiva.com/25931/mbr0530-25931989.pdf?src-supplier=Avnet+Europe, ComponentLink6URL=https://datasheet.ciiva.com/25931/mbr0530-25931989.pdf?src-supplier=Avnet+Europe, ComponentLink7Description=https://datasheet.ciiva.com/8300/mbr0530-8300905.pdf?src-supplier=Avnet, ComponentLink7URL=https://datasheet.ciiva.com/8300/mbr0530-8300905.pdf?src-supplier=Avnet, ComponentLink8Description=https://datasheet.ciiva.com/17318/mbr0530-17318568.pdf?src-supplier=Future+Electronics, ComponentLink8URL=https://datasheet.ciiva.com/17318/mbr0530-17318568.pdf?src-supplier=Future+Electronics, ComponentLink9Description=https://datasheet.ciiva.com/15144/getdatasheetpartid-86760-15144598.pdf?src-supplier=Verical, ComponentLink9URL=https://datasheet.ciiva.com/15144/getdatasheetpartid-86760-15144598.pdf?src-supplier=Verical, ComponentLink10Description=https://datasheet.ciiva.com/910/mbr0530-910518.pdf?src-supplier=Digi-Key, ComponentLink10URL=https://datasheet.ciiva.com/910/mbr0530-910518.pdf?src-supplier=Digi-Key, Contact Plating=Tin,Matte, Current Rating=500mA, Design Item ID=DSC-0.5/30-SOD123, Element Configuration=Single, Forward Current=500mA, Height=1.03mm, Lead Free="Lead Free", Length=2.7mm, Max Reverse Leakage Current=130uA, Max Reverse Voltage (DC)=30V, Max Surge Current=5.5A, Mount="Surface Mount", Output Current=500mA, Peak Non-Repetitive Surge Current=5.5A, Polarity=Standard, Pricing 1="1=0,34400, 10=0,23900, 100=0,12200, 500=0,10000 (USD)", Radiation Hardening=No, REACH SVHC="No SVHC", RoHS Compliant=Yes, Series=-, Source="Filter components.SchLib", Stock 1=9, Voltage Rating (DC)=30V, Weight=0.03g, Width=1.6mm